# EAGLE board SparkFun_Thing_Plus_RA6M5-Panel (EAGLE 9.6.2), part 1 of 3
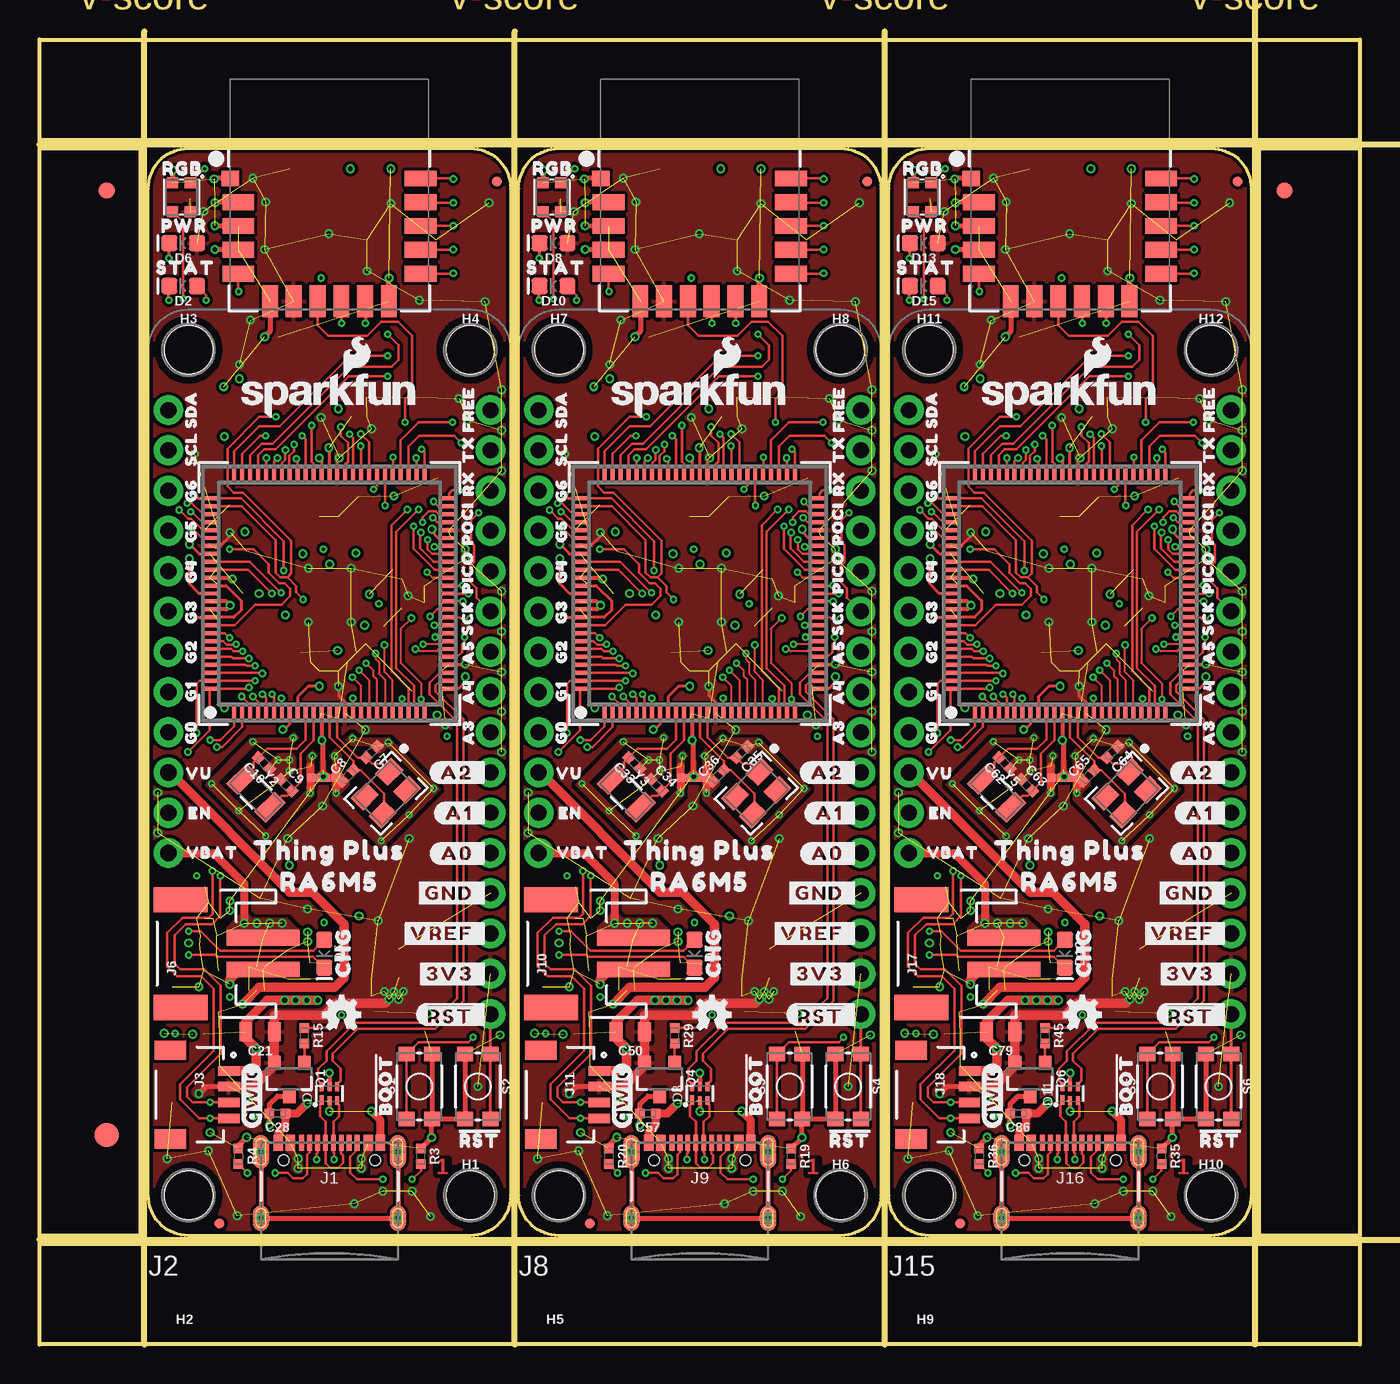
[diagram p0: board, top side]
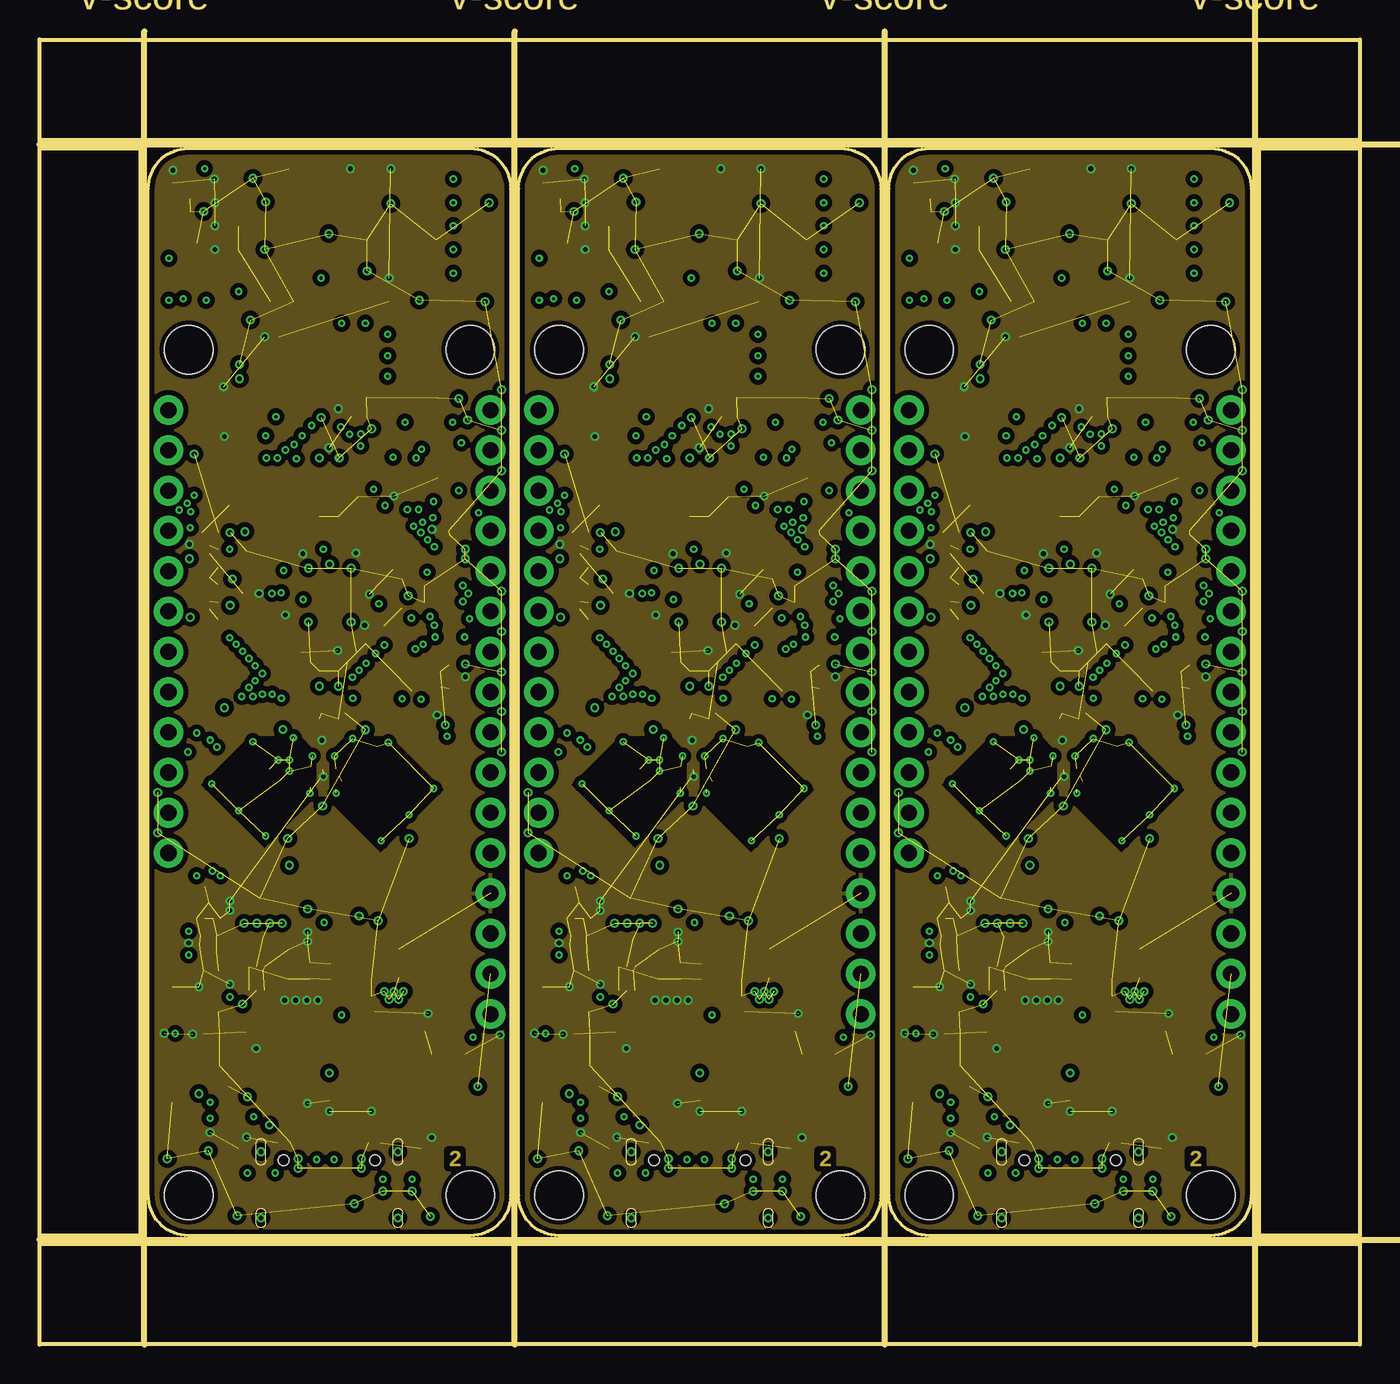
[diagram p1: board, inner layer Route2]
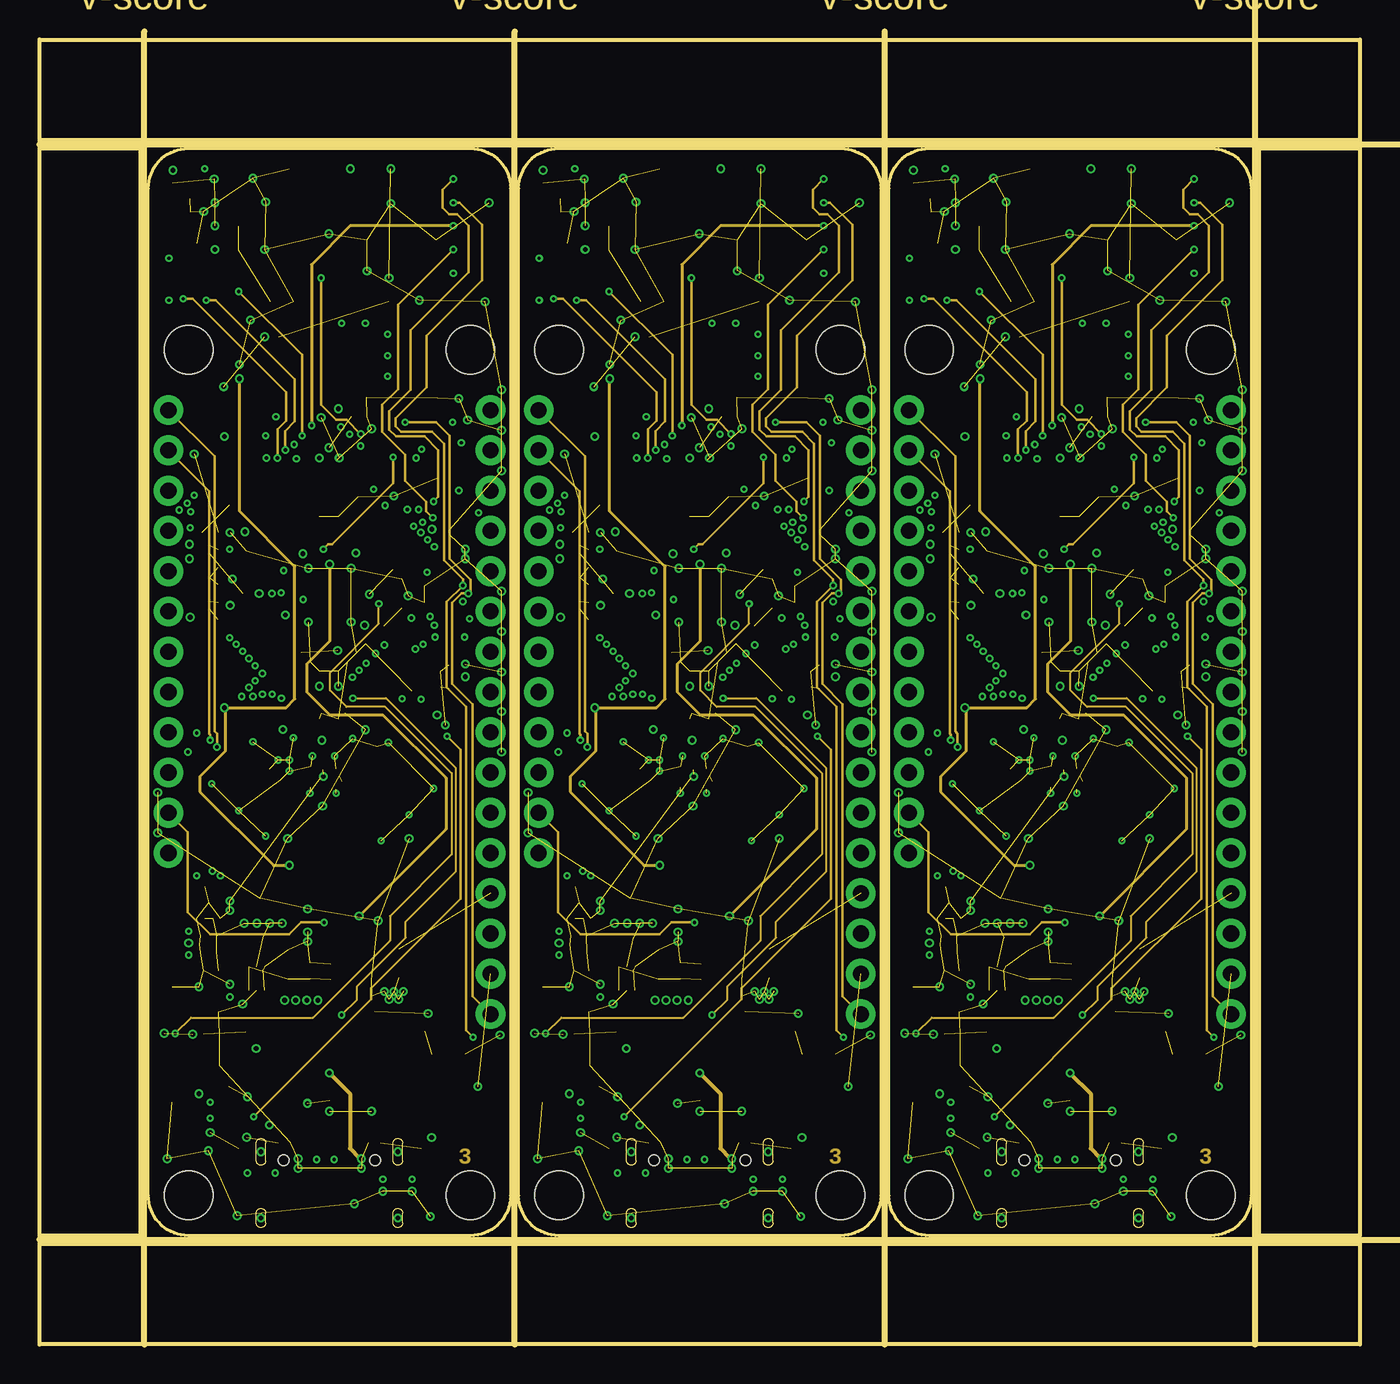
[diagram p2: board, inner layer Route3]
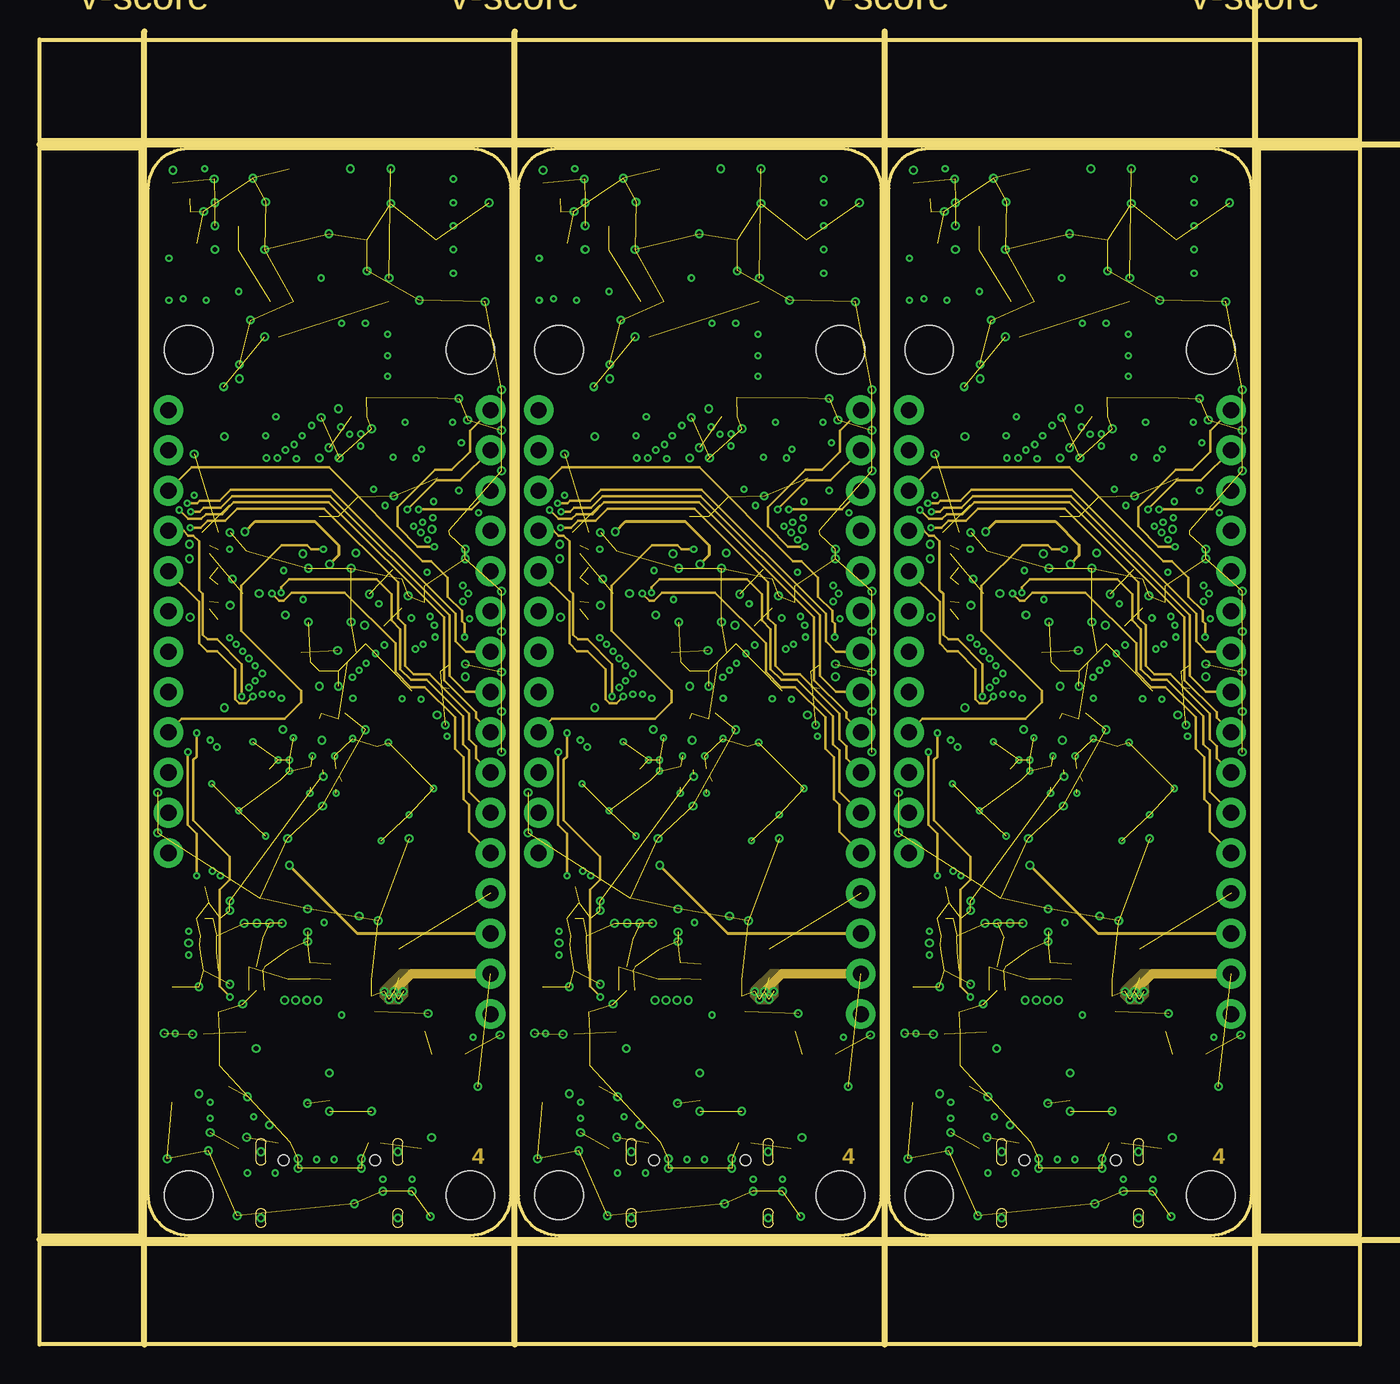
[diagram p3: board, inner layer Route14]
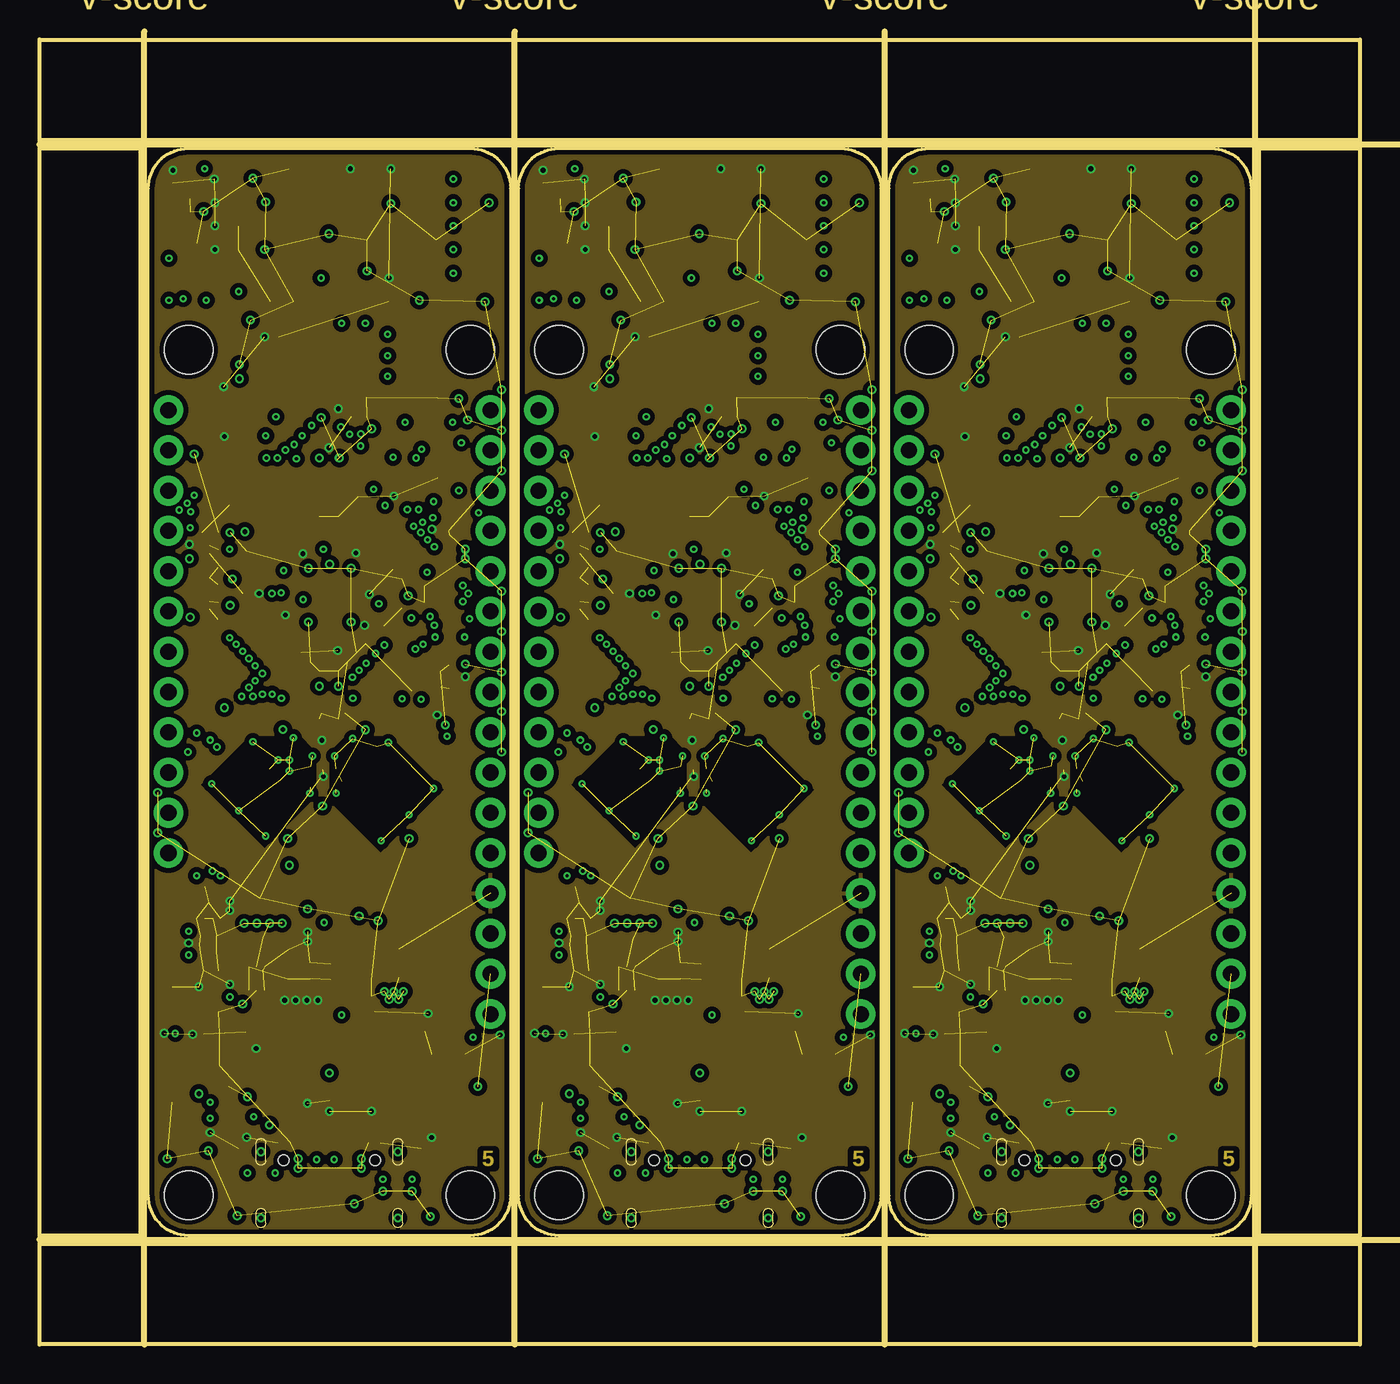
[diagram p4: board, inner layer Route15]
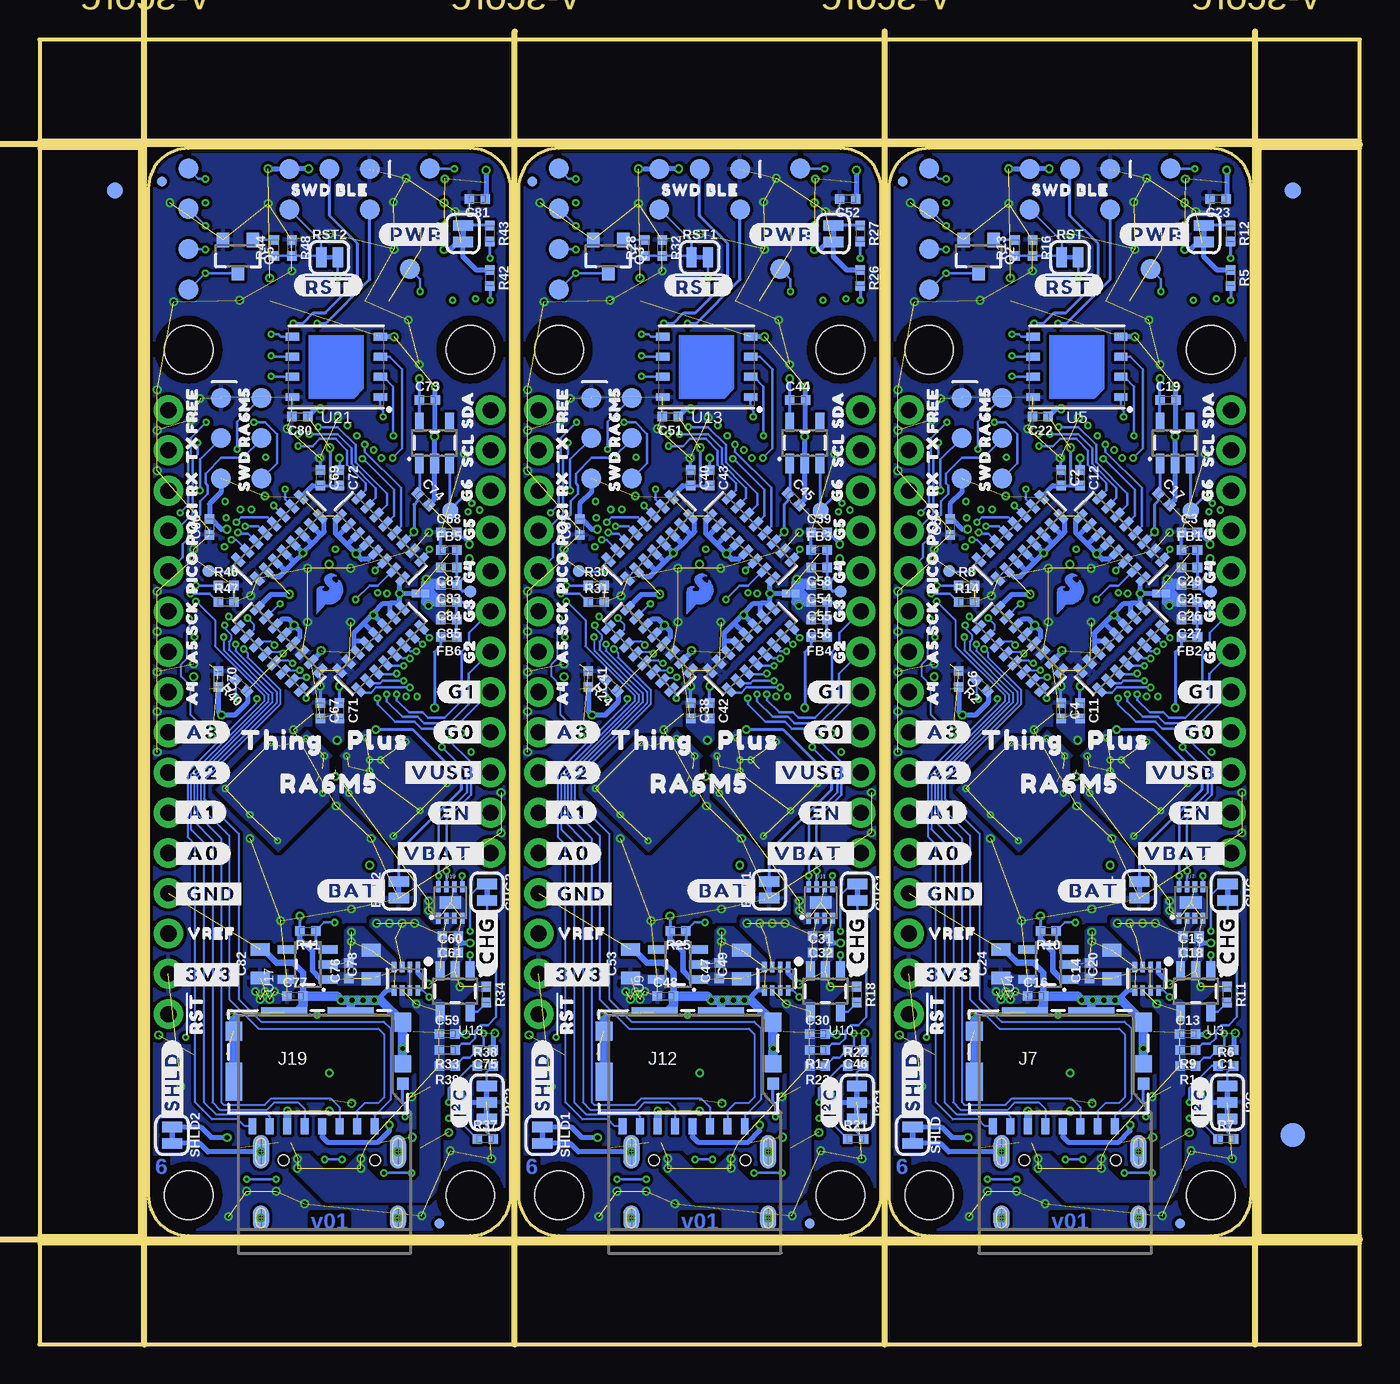
[diagram p5: board, bottom side, seen from below]

Size 83.31 x 82.3 mm. Coordinates in mm from the lower left corner, seen from the top.
Outline: 6.86,72.9 arc-90 9.4,75.44 27.18,75.44 arc-90 29.72,72.9 29.72,9.4 arc-90 27.18,6.86 9.4,6.86 arc-90 6.86,9.4 6.86,72.9
Outline: 30.23,72.9 arc-90 32.77,75.44 50.55,75.44 arc-90 53.09,72.9 53.09,9.4 arc-90 50.55,6.86 32.77,6.86 arc-90 30.23,9.4 30.23,72.9
Outline: 53.59,72.9 arc-90 56.13,75.44 73.91,75.44 arc-90 76.45,72.9 76.45,9.4 arc-90 73.91,6.86 56.13,6.86 arc-90 53.59,9.4 53.59,72.9
Outline: 0,6.35 83.31,6.35 83.31,0 0,0 0,6.35
Outline: 76.96,75.44 83.31,75.44 83.31,6.86 76.96,6.86 76.96,75.44
Outline: 0,82.3 83.31,82.3 83.31,75.95 0,75.95 0,82.3
Outline: 0,75.44 6.35,75.44 6.35,6.86 0,6.86 0,75.44
Copper layers (1+2*3+14*15+16): Top 0.035mm / dielectric 0.0994mm / Route2 0.0152mm / dielectric 0.55mm / Route3 0.0152mm / dielectric 0.1088mm / Route14 0.0152mm / dielectric 0.55mm / Route15 0.0152mm / dielectric 0.0994mm / Bottom 0.035mm
Design rules "SparkFun_Thing_Plus_RA6M5": minimum track width 0.09mm, minimum drill 0.2mm, track to track 0.09mm, track to pad 5mil, pad to pad 5mil, via to via 5mil, smd to smd 5mil, copper to edge 7mil, drill to drill 7mil, minimum pad ring 5mil, minimum via ring 5mil, stop-mask expansion 2.5mil, vias tented up to drill 25mil, thermal gap 10mil
Net classes: 2 CLK signals: width 0.15 mm, drill 0.2 mm, clearance 0.15 mm to class 0, clearance 0.15 mm to class 1, clearance 0.15 mm; 3 Analog Ground: width 0.2 mm, clearance 0.2 mm to class 1, clearance 0.3 mm to class 2; 4 Power: width 0.2 mm, drill 0.3 mm, clearance 0.2 mm to class 0, clearance 0.1 mm to class 1, clearance 0.15 mm to class 2, clearance 0.2 mm to class 3, clearance 0.2 mm; 5 USB diff: width 0.16 mm, drill 0.2 mm, clearance 0.3 mm to class 0, clearance 0.3 mm to class 1, clearance 0.3 mm to class 2, clearance 0.3 mm to class 3, clearance 0.2 mm to class 4, clearance 0.22 mm
Milling: 6 lines

## Footprints (pad centres in the part's own frame; a part is rotated, then mirrored left to right if it is on the bottom)
SMT-JUMPER_2_NC_TRACE_SILK = smd 0.66 x 1.27: 1 -0.521,0; 2 0.521,0
0402-TIGHT = smd 0.6 x 0.6: 1 -0.5,0; 2 0.5,0
0402-TIGHT_NO_CREAM = smd 0.6 x 0.6: 1 -0.5,0; 2 0.5,0
0805 = smd 0.8 x 1.2: 1 -0.9,0; 2 0.9,0
SOT886 = smd 0.61 x 0.25: 1 -0.405,0.5 | smd 0.56 x 0.25: 2 -0.43,0; 3 -0.43,-0.5; 4 0.43,-0.5; 5 0.43,0; 6 0.43,0.5
LED-0603 = smd 1 x 1: A -0.877,0; C 0.877,0
WS2812-2020 = smd 0.7 x 0.7: DI -0.915,0.55; DO 0.915,-0.55; GND 0.915,0.55; VCC -0.915,-0.55
FIDUCIAL-1X2 = smd 1 x 1: 1 0,0
FIDUCIAL-1.5X3 = smd 1.5 x 1.5: 1 0,0
FIDUCIAL-MICRO = smd 0.635 x 0.635: 1 0,0
STAND-OFF-TIGHT = hole 3.048: 0,0
SMT-JUMPER_3_2-NC_TRACE_SILK = smd 0.66 x 1.27: 1 -1.041,0; 2 0,0; 3 1.041,0
USB-C-16P-6LAYER-ISOLATED = smd 0.3 x 1: A5 -1.25,-0.34; A6 -0.25,-0.34; A7 0.25,-0.34; A8 1.25,-0.34; B5 1.75,-0.34; B6 0.75,-0.34; B7 -0.75,-0.34; B8 -1.75,-0.34 | smd 0.6 x 1: GND -3.225,-0.34; GND2 3.225,-0.34; VBUS1 -2.45,-0.34; VBUS2 2.45,-0.34 | smd 1 x 2.1: SHLD1 -4.32,-0.915; SHLD2 4.32,-0.915 | smd 1 x 2.1 bottom: SHLD3 -4.32,-0.915; SHLD4 4.32,-0.915 | smd 1 x 1.6: SHLD5 -4.32,-5.095; SHLD8 4.32,-5.095 | smd 1 x 1.6 bottom: SHLD6 -4.32,-5.095; SHLD7 4.32,-5.095 | hole 0.65: -2.89,-1.445; 2.89,-1.445
THING_PLUS = drill 1.016 pad 1.88: 1 1.27,52.07; 2 1.27,49.53; 3 1.27,46.99; 4 1.27,44.45; 5 1.27,41.91; 6 1.27,39.37; 7 1.27,36.83; 8 1.27,34.29; 9 1.27,31.75; 10 1.27,29.21; 11 1.27,26.67; 12 1.27,24.13; 13 21.59,52.07; 14 21.59,49.53; 15 21.59,46.99; 16 21.59,44.45; 17 21.59,41.91; 18 21.59,39.37; 19 21.59,36.83; 20 21.59,34.29; 21 21.59,31.75; 22 21.59,29.21; 23 21.59,26.67; 24 21.59,24.13; 25 21.59,21.59; 26 21.59,19.05; 27 21.59,16.51; 28 21.59,13.97
JST04_1MM_RA = smd 0.6 x 1.35: 1 -1.5,0; 2 -0.5,0; 3 0.5,0; 4 1.5,0 | smd 1.2 x 2: NC1 2.8,-3.675; NC2 -2.8,-3.675
PAD_05_03X2_TP = smd 1.27 x 1.27: 1 -2.54,-1.27; 2 -2.54,1.27; 3 0,-1.27; 4 0,1.27; 5 2.54,-1.27; 6 2.54,1.27
PAD_05_03X2_TP_NO4 = smd 1.27 x 1.27: 1 -2.54,-1.27; 2 -2.54,1.27; 3 0,-1.27; 5 2.54,-1.27; 6 2.54,1.27
JST-2-SMD = smd 1 x 4.6: 1 -1,-3.7; 2 1,-3.7 | smd 1.6 x 3.4: NC1 -3.4,1.5; NC2 3.4,1.5
MICROSD_TINY = smd 0.5 x 1: 1 3.55,-3.85; 2 2.45,-3.85; 3 1.35,-3.85; 4 0.25,-3.85; 5 -0.85,-3.85; 6 -1.95,-3.85; 7 -3.05,-3.85; 8 -4.15,-3.85 | smd 0.72 x 0.78: 9 5.35,-1.17 | smd 1.05 x 1.08: GND1 5.35,0.1 | smd 1.05 x 1.2: GND2 5.35,2.71; GND3 -5.325,2.14 | smd 1.05 x 2.39: GND4 -5.325,-1.045 | smd 2.91 x 0.55: GND5 -2.145,3.385; GND6 2.045,3.385
SOT23-3 = smd 0.8 x 0.9: 1 -0.95,-1; 2 0.95,-1; 3 0,1.1
2506_AR = smd 0.45 x 0.9: 1 -2.8,-0.85; 2 -2,-0.85; 3 -1.2,-0.85; 4 -0.4,-0.85; 5 0.4,-0.85; 6 1.2,-0.85; 7 2,-0.85; 8 2.8,-0.85; 9 2.8,0.85; 10 2,0.85; 11 1.2,0.85; 12 0.4,0.85; 13 -0.4,0.85; 14 -1.2,0.85; 15 -2,0.85; 16 -2.8,0.85
TACTILE_SWITCH_SMD_4.6X2.8MM = smd 0.9 x 1: 1 -2.05,-0.8; 2 2.05,-0.8; 3 2.05,0.8; 4 -2.05,0.8
2PT_GND_TIE_SMALL = smd 0.5 x 0.5: P$1 0,0.3; P$2 0,-0.3
PAD.03X.05 = smd 1.27 x 1.27: 1 0,0
PAD.03X.04 = smd 1.016 x 1.016: 1 0,0
PAD.03X.03 = smd 0.762 x 0.762: 1 0,0
P-LQFP100-14X14-0.50 = smd 0.25 x 1.1: 1 -6,-7.55; 2 -5.5,-7.55; 3 -5,-7.55; 4 -4.5,-7.55; 5 -4,-7.55; 6 -3.5,-7.55; 7 -3,-7.55; 8 -2.5,-7.55; 9 -2,-7.55; 10 -1.5,-7.55; 11 -1,-7.55; 12 -0.5,-7.55; 13 0,-7.55; 14 0.5,-7.55; 15 1,-7.55; 16 1.5,-7.55; 17 2,-7.55; 18 2.5,-7.55; 19 3,-7.55; 20 3.5,-7.55; 21 4,-7.55; 22 4.5,-7.55; 23 5,-7.55; 24 5.5,-7.55; 25 6,-7.55; 51 6,7.55; 52 5.5,7.55; 53 5,7.55; 54 4.5,7.55; 55 4,7.55; 56 3.5,7.55; 57 3,7.55; 58 2.5,7.55; 59 2,7.55; 60 1.5,7.55; 61 1,7.55; 62 0.5,7.55; 63 0,7.55; 64 -0.5,7.55; 65 -1,7.55; 66 -1.5,7.55; 67 -2,7.55; 68 -2.5,7.55; 69 -3,7.55; 70 -3.5,7.55; 71 -4,7.55; 72 -4.5,7.55; 73 -5,7.55; 74 -5.5,7.55; 75 -6,7.55 | smd 1.1 x 0.25: 26 7.55,-6; 27 7.55,-5.5; 28 7.55,-5; 29 7.55,-4.5; 30 7.55,-4; 31 7.55,-3.5; 32 7.55,-3; 33 7.55,-2.5; 34 7.55,-2; 35 7.55,-1.5; 36 7.55,-1; 37 7.55,-0.5; 38 7.55,0; 39 7.55,0.5; 40 7.55,1; 41 7.55,1.5; 42 7.55,2; 43 7.55,2.5; 44 7.55,3; 45 7.55,3.5; 46 7.55,4; 47 7.55,4.5; 48 7.55,5; 49 7.55,5.5; 50 7.55,6; 76 -7.55,6; 77 -7.55,5.5; 78 -7.55,5; 79 -7.55,4.5; 80 -7.55,4; 81 -7.55,3.5; 82 -7.55,3; 83 -7.55,2.5; 84 -7.55,2; 85 -7.55,1.5; 86 -7.55,1; 87 -7.55,0.5; 88 -7.55,0; 89 -7.55,-0.5; 90 -7.55,-1; 91 -7.55,-1.5; 92 -7.55,-2; 93 -7.55,-2.5; 94 -7.55,-3; 95 -7.55,-3.5; 96 -7.55,-4; 97 -7.55,-4.5; 98 -7.55,-5; 99 -7.55,-5.5; 100 -7.55,-6
DA14531MOD = smd 1.1 x 1: 1 -6.25,1 | smd 2 x 1: 2 -5.75,-0.5; 3 -5.75,-2; 4 -5.75,-3.5; 5 -5.75,-5; 12 5.75,-5; 13 5.75,-3.5; 14 5.75,-2; 15 5.75,-0.5; 16 5.75,1 | smd 1 x 2: 6 -3.75,-6.75; 7 -2.25,-6.75; 8 -0.75,-6.75; 9 0.75,-6.75; 10 2.25,-6.75; 11 3.75,-6.75
SOT23-5 = smd 0.55 x 1.2: 1 -0.95,-1.3; 2 0,-1.3; 3 0.95,-1.3; 4 0.95,1.3; 5 -0.95,1.3
WSON-8-6X5 = smd 0.85 x 0.5: 1 -2.775,1.905; 2 -2.775,0.635; 3 -2.775,-0.635; 4 -2.775,-1.905; 5 2.775,-1.905; 6 2.775,-0.635; 7 2.775,0.635; 8 2.775,1.905
DFN-8 = smd 0.3 x 0.7: 1 -0.75,-0.99; 2 -0.25,-0.99; 3 0.25,-0.99; 4 0.75,-0.99; 5 0.75,0.99; 6 0.25,0.99; 7 -0.25,0.99; 8 -0.75,0.99 | smd 1.38 x 0.8: 9 0,0
SOT8 = smd 0.67 x 0.3: 1 -0.74,0.75; 2 -0.74,0.25; 3 -0.74,-0.25; 4 -0.74,-0.75; 5 0.74,-0.75; 6 0.74,-0.25; 7 0.74,0.25; 8 0.74,0.75
4-SMD,32X25 = smd 1.4 x 1.1: 1 -1.1,-0.8; 2 1.1,-0.8; 3 1.1,0.8; 4 -1.1,0.8
CRYSTAL-SMD-3.2X1.5MM = smd 1 x 1.8: P$1 -1.25,0; P$2 1.25,0

## Placement (x,y rotation side)
BAT  JUMPER-SMT_2_NC_TRACE_SILK  [SMT-JUMPER_2_NC_TRACE_SILK]  13.91,28.66 90 bottom
BAT1  JUMPER-SMT_2_NC_TRACE_SILK  [SMT-JUMPER_2_NC_TRACE_SILK]  37.28,28.66 90 bottom
BAT2  JUMPER-SMT_2_NC_TRACE_SILK  [SMT-JUMPER_2_NC_TRACE_SILK]  60.64,28.66 90 bottom
C1  1.0uF  [0402-TIGHT]  8.46,18.56 180 bottom
C2  0.1uF  [0402-TIGHT]  18.86,54.66 270 bottom
C3  0.1uF  [0402-TIGHT]  10.76,51.21 0 bottom
C4  0.1uF  [0402-TIGHT]  18.86,39.96 270 bottom
C5  0.1uF  [0402-TIGHT]  25.86,51.56 90 bottom
C6  0.1uF  [0402-TIGHT]  25.31,41.96 270 bottom
C7  DNP  [0402-TIGHT_NO_CREAM]  20.96,37.36 225 top
C8  DNP  [0402-TIGHT_NO_CREAM]  19.46,35.86 45 top
C9  9.1pF  [0402-TIGHT]  15.56,35.26 315 top
C10  9.1pF  [0402-TIGHT]  14.16,36.66 135 top
C11  0.1uF  [0402-TIGHT]  17.66,39.96 270 bottom
C12  0.1uF  [0402-TIGHT]  17.66,54.66 270 bottom
C13  2.2uF  [0402-TIGHT]  10.86,19.57 0 bottom
C14  2.2uF  [0402-TIGHT]  17.06,23.56 90 bottom
C15  2.2uF  [0402-TIGHT]  10.67,24.72 0 bottom
C16  2.2uF  [0402-TIGHT]  20.46,21.96 0 bottom
C17  2.2uF  [0402-TIGHT]  12.36,53.31 315 bottom
C18  0.1uF  [0402-TIGHT]  10.66,25.76 180 bottom
C19  1.0uF  [0402-TIGHT]  12.11,59.56 0 bottom
C20  10uF  [0805]  15.66,23.96 90 bottom
C21  10uF  [0805]  13.91,19.71 180 top
C22  0.1uF  [0402-TIGHT]  20.16,58.51 180 bottom
C23  0.1uF  [0402-TIGHT]  8.96,72.26 180 bottom
C24  47uF/6.3V  [0805]  22.66,24.01 90 bottom
C25  0.1uF  [0402-TIGHT]  10.76,47.91 180 bottom
C26  0.1uF  [0402-TIGHT]  10.76,46.81 180 bottom
C27  1.0uF  [0402-TIGHT]  10.76,45.71 180 bottom
C28  0.1uF  [0402-TIGHT]  15.01,14.56 180 top
C29  1.0uF  [0402-TIGHT]  10.76,49.01 180 bottom
C30  2.2uF  [0402-TIGHT]  34.23,19.57 0 bottom
C31  2.2uF  [0402-TIGHT]  34.03,24.72 0 bottom
C32  0.1uF  [0402-TIGHT]  34.03,25.76 180 bottom
C33  9.1pF  [0402-TIGHT]  37.53,36.66 135 top
C34  9.1pF  [0402-TIGHT]  38.93,35.26 315 top
C35  DNP  [0402-TIGHT_NO_CREAM]  44.33,37.36 225 top
C36  DNP  [0402-TIGHT_NO_CREAM]  42.83,35.86 45 top
C37  0.1uF  [0402-TIGHT]  49.23,51.56 90 bottom
C38  0.1uF  [0402-TIGHT]  42.23,39.96 270 bottom
C39  0.1uF  [0402-TIGHT]  34.13,51.21 0 bottom
C40  0.1uF  [0402-TIGHT]  42.23,54.66 270 bottom
C41  0.1uF  [0402-TIGHT]  48.68,41.96 270 bottom
C42  0.1uF  [0402-TIGHT]  41.03,39.96 270 bottom
C43  0.1uF  [0402-TIGHT]  41.03,54.66 270 bottom
C44  1.0uF  [0402-TIGHT]  35.48,59.56 0 bottom
C45  2.2uF  [0402-TIGHT]  35.73,53.31 315 bottom
C46  1.0uF  [0402-TIGHT]  31.83,18.56 180 bottom
C47  2.2uF  [0402-TIGHT]  40.43,23.56 90 bottom
C48  2.2uF  [0402-TIGHT]  43.83,21.96 0 bottom
C49  10uF  [0805]  39.03,23.96 90 bottom
C50  10uF  [0805]  37.28,19.71 180 top
C51  0.1uF  [0402-TIGHT]  43.53,58.51 180 bottom
C52  0.1uF  [0402-TIGHT]  32.33,72.26 180 bottom
C53  47uF/6.3V  [0805]  46.03,24.01 90 bottom
C54  0.1uF  [0402-TIGHT]  34.13,47.91 180 bottom
C55  0.1uF  [0402-TIGHT]  34.13,46.81 180 bottom
C56  1.0uF  [0402-TIGHT]  34.13,45.71 180 bottom
C57  0.1uF  [0402-TIGHT]  38.38,14.56 180 top
C58  1.0uF  [0402-TIGHT]  34.13,49.01 180 bottom
C59  2.2uF  [0402-TIGHT]  57.6,19.57 0 bottom
C60  2.2uF  [0402-TIGHT]  57.4,24.72 0 bottom
C61  0.1uF  [0402-TIGHT]  57.39,25.76 180 bottom
C62  9.1pF  [0402-TIGHT]  60.89,36.66 135 top
C63  9.1pF  [0402-TIGHT]  62.29,35.26 315 top
C64  DNP  [0402-TIGHT_NO_CREAM]  67.69,37.36 225 top
C65  DNP  [0402-TIGHT_NO_CREAM]  66.19,35.86 45 top
C66  0.1uF  [0402-TIGHT]  72.59,51.56 90 bottom
C67  0.1uF  [0402-TIGHT]  65.59,39.96 270 bottom
C68  0.1uF  [0402-TIGHT]  57.49,51.21 0 bottom
C69  0.1uF  [0402-TIGHT]  65.59,54.66 270 bottom
C70  0.1uF  [0402-TIGHT]  72.04,41.96 270 bottom
C71  0.1uF  [0402-TIGHT]  64.39,39.96 270 bottom
C72  0.1uF  [0402-TIGHT]  64.39,54.66 270 bottom
C73  1.0uF  [0402-TIGHT]  58.84,59.56 0 bottom
C74  2.2uF  [0402-TIGHT]  59.09,53.31 315 bottom
C75  1.0uF  [0402-TIGHT]  55.19,18.56 180 bottom
C76  2.2uF  [0402-TIGHT]  63.79,23.56 90 bottom
C77  2.2uF  [0402-TIGHT]  67.19,21.96 0 bottom
C78  10uF  [0805]  62.39,23.96 90 bottom
C79  10uF  [0805]  60.64,19.71 180 top
C80  0.1uF  [0402-TIGHT]  66.89,58.51 180 bottom
C81  0.1uF  [0402-TIGHT]  55.69,72.26 180 bottom
C82  47uF/6.3V  [0805]  69.39,24.01 90 bottom
C83  0.1uF  [0402-TIGHT]  57.49,47.91 180 bottom
C84  0.1uF  [0402-TIGHT]  57.49,46.81 180 bottom
C85  1.0uF  [0402-TIGHT]  57.49,45.71 180 bottom
C86  0.1uF  [0402-TIGHT]  61.74,14.56 180 top
C87  1.0uF  [0402-TIGHT]  57.49,49.01 180 bottom
CHG  JUMPER-SMT_2_NC_TRACE_SILK  [SMT-JUMPER_2_NC_TRACE_SILK]  8.35,28.51 270 bottom
CHG1  JUMPER-SMT_2_NC_TRACE_SILK  [SMT-JUMPER_2_NC_TRACE_SILK]  31.71,28.51 270 bottom
CHG2  JUMPER-SMT_2_NC_TRACE_SILK  [SMT-JUMPER_2_NC_TRACE_SILK]  55.08,28.51 270 bottom
D1  PRTR5V0U2F  [SOT886]  18.29,15.81 90 top
D2  BLUE  [LED-0603]  9.06,66.76 180 top
D3  PRTR5V0U2F  [SOT886]  41.66,15.81 90 top
D4  WS2812_2020  [WS2812-2020]  8.96,72.36 90 top
D5  Yellow  [LED-0603]  17.96,24.64 270 top
D6  [LED-0603]  9.06,69.46 180 top
D7  Yellow  [LED-0603]  41.33,24.64 270 top
D8  [LED-0603]  32.43,69.46 180 top
D9  WS2812_2020  [WS2812-2020]  32.33,72.36 90 top
D10  BLUE  [LED-0603]  32.43,66.76 180 top
D11  PRTR5V0U2F  [SOT886]  65.02,15.81 90 top
D12  Yellow  [LED-0603]  64.69,24.64 270 top
D13  [LED-0603]  55.79,69.46 180 top
D14  WS2812_2020  [WS2812-2020]  55.69,72.36 90 top
D15  BLUE  [LED-0603]  55.79,66.76 180 top
E$1  [FIDUCIAL-1X2]  4.23,72.77 0 top
E$2  [FIDUCIAL-1X2]  4.23,72.77 0 bottom
E$3  [FIDUCIAL-1X2]  78.57,72.77 0 top
E$4  [FIDUCIAL-1X2]  78.57,72.77 0 bottom
E$5  [FIDUCIAL-1.5X3]  4.23,13.21 0 top
E$6  [FIDUCIAL-1.5X3]  4.23,13.21 0 bottom
FB1  120-OHM  [0402-TIGHT]  10.76,50.11 0 bottom
FB2  120-OHM  [0402-TIGHT]  10.76,44.61 180 bottom
FB3  120-OHM  [0402-TIGHT]  34.13,50.11 0 bottom
FB4  120-OHM  [0402-TIGHT]  34.13,44.61 180 bottom
FB5  120-OHM  [0402-TIGHT]  57.49,50.11 0 bottom
FB6  120-OHM  [0402-TIGHT]  57.49,44.61 180 bottom
FD1  FIDUCIALUFIDUCIAL  [FIDUCIAL-MICRO]  28.86,73.36 0 top
FD2  FIDUCIALUFIDUCIAL  [FIDUCIAL-MICRO]  11.36,7.61 0 bottom
FD3  FIDUCIALUFIDUCIAL  [FIDUCIAL-MICRO]  28.86,73.36 0 bottom
FD4  FIDUCIALUFIDUCIAL  [FIDUCIAL-MICRO]  11.36,7.61 0 top
FD5  FIDUCIALUFIDUCIAL  [FIDUCIAL-MICRO]  34.73,7.61 0 top
FD6  FIDUCIALUFIDUCIAL  [FIDUCIAL-MICRO]  34.73,7.61 0 bottom
FD7  FIDUCIALUFIDUCIAL  [FIDUCIAL-MICRO]  52.23,73.36 0 top
FD8  FIDUCIALUFIDUCIAL  [FIDUCIAL-MICRO]  52.23,73.36 0 bottom
FD9  FIDUCIALUFIDUCIAL  [FIDUCIAL-MICRO]  58.09,7.61 0 top
FD10  FIDUCIALUFIDUCIAL  [FIDUCIAL-MICRO]  58.09,7.61 0 bottom
FD11  FIDUCIALUFIDUCIAL  [FIDUCIAL-MICRO]  75.59,73.36 0 top
FD12  FIDUCIALUFIDUCIAL  [FIDUCIAL-MICRO]  75.59,73.36 0 bottom
FRAME1  FRAME-LEDGERNO_FOOTPRINT  [DUMMY]  54.5,8.75 0 top
FRAME2  FRAME-LEDGERNO_FOOTPRINT  [DUMMY]  31.13,8.75 0 top
FRAME3  FRAME-LEDGERNO_FOOTPRINT  [DUMMY]  77.87,8.75 0 top
H1  STAND-OFFTIGHT  [STAND-OFF-TIGHT]  27.18,9.4 0 top
H2  STAND-OFFTIGHT  [STAND-OFF-TIGHT]  9.4,9.4 0 top
H3  STAND-OFFTIGHT  [STAND-OFF-TIGHT]  9.4,62.74 0 top
H4  STAND-OFFTIGHT  [STAND-OFF-TIGHT]  27.18,62.74 0 top
H5  STAND-OFFTIGHT  [STAND-OFF-TIGHT]  32.77,9.4 0 top
H6  STAND-OFFTIGHT  [STAND-OFF-TIGHT]  50.55,9.4 0 top
H7  STAND-OFFTIGHT  [STAND-OFF-TIGHT]  32.77,62.74 0 top
H8  STAND-OFFTIGHT  [STAND-OFF-TIGHT]  50.55,62.74 0 top
H9  STAND-OFFTIGHT  [STAND-OFF-TIGHT]  56.13,9.4 0 top
H10  STAND-OFFTIGHT  [STAND-OFF-TIGHT]  73.91,9.4 0 top
H11  STAND-OFFTIGHT  [STAND-OFF-TIGHT]  56.13,62.74 0 top
H12  STAND-OFFTIGHT  [STAND-OFF-TIGHT]  73.91,62.74 0 top
I2C  JUMPER-SMT_3_2-NC_TRACE_SILK  [SMT-JUMPER_3_2-NC_TRACE_SILK]  8.36,15.26 270 bottom
I2C1  JUMPER-SMT_3_2-NC_TRACE_SILK  [SMT-JUMPER_3_2-NC_TRACE_SILK]  31.73,15.26 270 bottom
I2C2  JUMPER-SMT_3_2-NC_TRACE_SILK  [SMT-JUMPER_3_2-NC_TRACE_SILK]  55.09,15.26 270 bottom
J1  USB Female Type C Connector  [USB-C-16P-6LAYER-ISOLATED]  18.29,13.06 0 top
J2  THING_PLUS_LOGICAL  [THING_PLUS]  6.86,6.86 0 top
J3  QWIIC_RA  [JST04_1MM_RA]  11.94,15.75 270 top
J4  CONN_03X2  [PAD_05_03X2_TP]  23.86,57.16 270 bottom
J5  [PAD_05_03X2_TP_NO4]  18.29,72.86 180 bottom
J6  [JST-2-SMD]  10.41,24.64 90 top
J7  MICRO-SDFRICTION  [MICROSD_TINY]  19,17.6 0 bottom
J8  THING_PLUS_LOGICAL  [THING_PLUS]  30.23,6.86 0 top
J9  USB Female Type C Connector  [USB-C-16P-6LAYER-ISOLATED]  41.66,13.06 0 top
J10  [JST-2-SMD]  33.78,24.64 90 top
J11  QWIIC_RA  [JST04_1MM_RA]  35.31,15.75 270 top
J12  MICRO-SDFRICTION  [MICROSD_TINY]  42.37,17.6 0 bottom
J13  CONN_03X2  [PAD_05_03X2_TP]  47.23,57.16 270 bottom
J14  [PAD_05_03X2_TP_NO4]  41.66,72.86 180 bottom
J15  THING_PLUS_LOGICAL  [THING_PLUS]  53.59,6.86 0 top
J16  USB Female Type C Connector  [USB-C-16P-6LAYER-ISOLATED]  65.02,13.06 0 top
J17  [JST-2-SMD]  57.15,24.64 90 top
J18  QWIIC_RA  [JST04_1MM_RA]  58.67,15.75 270 top
J19  MICRO-SDFRICTION  [MICROSD_TINY]  65.74,17.6 0 bottom
J20  CONN_03X2  [PAD_05_03X2_TP]  70.59,57.16 270 bottom
J21  [PAD_05_03X2_TP_NO4]  65.02,72.86 180 bottom
JP1  JUMPER-SMT_2_NC_TRACE_SILK  [SMT-JUMPER_2_NC_TRACE_SILK]  33.23,70.06 90 bottom
JP2  JUMPER-SMT_2_NC_TRACE_SILK  [SMT-JUMPER_2_NC_TRACE_SILK]  56.59,70.06 90 bottom
JP4  JUMPER-SMT_2_NC_TRACE_SILK  [SMT-JUMPER_2_NC_TRACE_SILK]  9.86,70.06 90 bottom
LOGO1  OSHW-LOGOMINI  [OSHW-LOGO-MINI]  19.06,20.79 0 top
LOGO2  SFE_LOGO_NAME_FLAME.1_INCH  [SFE_LOGO_NAME_FLAME_.1]  18.29,59.86 0 top
LOGO3  QWIIC_LOGO_4MM  [QWIIC_4MM]  13.4,15.68 90 top
LOGO4  SFE_LOGO_NAME_FLAMEBLANK  [BLANK]  30.12,7.74 0 top
LOGO5  SFE_LOGO_NAME_FLAME.1_INCH  [SFE_LOGO_NAME_FLAME_.1]  41.66,59.86 0 top
LOGO6  QWIIC_LOGO_4MM  [QWIIC_4MM]  36.77,15.68 90 top
LOGO7  OSHW-LOGOMINI  [OSHW-LOGO-MINI]  42.43,20.79 0 top
LOGO8  SFE_LOGO_NAME_FLAMEBLANK  [BLANK]  53.49,7.74 0 top
LOGO9  SFE_LOGO_NAME_FLAME.1_INCH  [SFE_LOGO_NAME_FLAME_.1]  65.02,59.86 0 top
LOGO10  QWIIC_LOGO_4MM  [QWIIC_4MM]  60.13,15.68 90 top
LOGO11  OSHW-LOGOMINI  [OSHW-LOGO-MINI]  65.79,20.79 0 top
LOGO12  SFE_LOGO_NAME_FLAMEBLANK  [BLANK]  76.85,7.74 0 top
Q1  20V/4.2A/52mΩ/1.4W  [SOT23-3]  15.76,16.76 180 top
Q2  20V/4.2A/52mΩ/1.4W  [SOT23-3]  24.06,68.66 180 bottom
Q3  20V/4.2A/52mΩ/1.4W  [SOT23-3]  47.43,68.66 180 bottom
Q4  20V/4.2A/52mΩ/1.4W  [SOT23-3]  39.13,16.76 180 top
Q5  20V/4.2A/52mΩ/1.4W  [SOT23-3]  70.79,68.66 180 bottom
Q6  20V/4.2A/52mΩ/1.4W  [SOT23-3]  62.49,16.76 180 top
R1  1k  [0402-TIGHT]  10.86,17.56 180 bottom
R2  20k  [0402-TIGHT]  23.86,41.56 135 bottom
R3  5.1k  [0402-TIGHT]  24.06,11.86 270 top
R4  5.1k  [0402-TIGHT]  12.56,11.86 270 top
R5  2.2k  [0402-TIGHT]  8.16,67.26 270 bottom
R6  2.2k  [0402-TIGHT]  8.46,17.56 0 bottom
R7  2.2k  [0402-TIGHT]  8.46,12.96 0 bottom
R8  10k  [0402-TIGHT]  24.81,47.86 0 bottom
R9  4.7k  [0402-TIGHT]  10.86,18.56 180 bottom
R10  1M  [0402-TIGHT]  19.66,26.06 180 bottom
R11  4.7k  [0402-TIGHT]  8.38,22.05 270 bottom
R12  4.7k  [0402-TIGHT]  8.16,70.06 270 bottom
R13  1k  [0402-TIGHT]  21.76,69.16 90 bottom
R14  10k  [0402-TIGHT]  24.81,46.81 0 bottom
R15  1k  [0402-TIGHT]  16.71,19.46 270 top
R16  10k  [0402-TIGHT]  20.66,69.16 270 bottom
R17  4.7k  [0402-TIGHT]  34.23,18.56 180 bottom
R18  4.7k  [0402-TIGHT]  31.74,22.05 270 bottom
R19  5.1k  [0402-TIGHT]  47.43,11.86 270 top
R20  5.1k  [0402-TIGHT]  35.93,11.86 270 top
R21  2.2k  [0402-TIGHT]  31.83,12.96 0 bottom
R22  2.2k  [0402-TIGHT]  31.83,17.56 0 bottom
R23  1k  [0402-TIGHT]  34.23,17.56 180 bottom
R24  20k  [0402-TIGHT]  47.23,41.56 135 bottom
R25  1M  [0402-TIGHT]  43.03,26.06 180 bottom
R26  2.2k  [0402-TIGHT]  31.53,67.26 270 bottom
R27  4.7k  [0402-TIGHT]  31.53,70.06 270 bottom
R28  1k  [0402-TIGHT]  45.13,69.16 90 bottom
R29  1k  [0402-TIGHT]  40.08,19.46 270 top
R30  10k  [0402-TIGHT]  48.18,47.86 0 bottom
R31  10k  [0402-TIGHT]  48.18,46.81 0 bottom
R32  10k  [0402-TIGHT]  44.03,69.16 270 bottom
R33  4.7k  [0402-TIGHT]  57.59,18.56 180 bottom
R34  4.7k  [0402-TIGHT]  55.11,22.05 270 bottom
R35  5.1k  [0402-TIGHT]  70.79,11.86 270 top
R36  5.1k  [0402-TIGHT]  59.29,11.86 270 top
R37  2.2k  [0402-TIGHT]  55.19,12.96 0 bottom
R38  2.2k  [0402-TIGHT]  55.19,17.56 0 bottom
R39  1k  [0402-TIGHT]  57.59,17.56 180 bottom
R40  20k  [0402-TIGHT]  70.59,41.56 135 bottom
R41  1M  [0402-TIGHT]  66.39,26.06 180 bottom
R42  2.2k  [0402-TIGHT]  54.89,67.26 270 bottom
R43  4.7k  [0402-TIGHT]  54.89,70.06 270 bottom
R44  1k  [0402-TIGHT]  68.49,69.16 90 bottom
R45  1k  [0402-TIGHT]  63.44,19.46 270 top
R46  10k  [0402-TIGHT]  71.54,47.86 0 bottom
R47  10k  [0402-TIGHT]  71.54,46.81 0 bottom
R48  10k  [0402-TIGHT]  67.39,69.16 270 bottom
RN1  10K  [2506_AR]  15.06,50.86 315 bottom
RN2  10K  [2506_AR]  44.83,50.86 45 bottom
RN3  10K  [2506_AR]  21.46,43.86 135 bottom
RN4  10K  [2506_AR]  21.46,50.86 45 bottom
RN5  10K  [2506_AR]  15.06,43.86 45 bottom
RN6  10K  [2506_AR]  38.43,50.86 315 bottom
RN7  10K  [2506_AR]  38.43,43.86 45 bottom
RN8  10K  [2506_AR]  44.83,43.86 135 bottom
RN9  10K  [2506_AR]  68.19,50.86 45 bottom
RN10  10K  [2506_AR]  61.79,50.86 315 bottom
RN11  10K  [2506_AR]  61.79,43.86 45 bottom
RN12  10K  [2506_AR]  68.19,43.86 135 bottom
RST  JUMPER-SMT_2_NC_TRACE_SILK  [SMT-JUMPER_2_NC_TRACE_SILK]  18.29,68.56 0 bottom
RST1  JUMPER-SMT_2_NC_TRACE_SILK  [SMT-JUMPER_2_NC_TRACE_SILK]  41.66,68.56 0 bottom
RST2  JUMPER-SMT_2_NC_TRACE_SILK  [SMT-JUMPER_2_NC_TRACE_SILK]  65.02,68.56 0 bottom
S1  BOOT  [TACTILE_SWITCH_SMD_4.6X2.8MM]  23.96,16.26 90 top
S2  RESET  [TACTILE_SWITCH_SMD_4.6X2.8MM]  27.66,16.26 270 top
S3  BOOT  [TACTILE_SWITCH_SMD_4.6X2.8MM]  47.33,16.26 90 top
S4  RESET  [TACTILE_SWITCH_SMD_4.6X2.8MM]  51.03,16.26 270 top
S5  BOOT  [TACTILE_SWITCH_SMD_4.6X2.8MM]  70.69,16.26 90 top
S6  RESET  [TACTILE_SWITCH_SMD_4.6X2.8MM]  74.39,16.26 270 top
SHLD  JUMPER-SMT_2_NC_TRACE_SILK  [SMT-JUMPER_2_NC_TRACE_SILK]  28.22,13.2 270 bottom
SHLD1  JUMPER-SMT_2_NC_TRACE_SILK  [SMT-JUMPER_2_NC_TRACE_SILK]  51.59,13.2 270 bottom
SHLD2  JUMPER-SMT_2_NC_TRACE_SILK  [SMT-JUMPER_2_NC_TRACE_SILK]  74.96,13.2 270 bottom
SUPPLYTIE1  2PT_GND_TIESMALL  [2PT_GND_TIE_SMALL]  12.56,47.36 270 bottom
SUPPLYTIE2  2PT_GND_TIESMALL  [2PT_GND_TIE_SMALL]  17.42,35.73 90 top
SUPPLYTIE3  2PT_GND_TIESMALL  [2PT_GND_TIE_SMALL]  18.36,35.73 90 top
SUPPLYTIE4  2PT_GND_TIESMALL  [2PT_GND_TIE_SMALL]  41.73,35.73 90 top
SUPPLYTIE5  2PT_GND_TIESMALL  [2PT_GND_TIE_SMALL]  40.79,35.73 90 top
SUPPLYTIE6  2PT_GND_TIESMALL  [2PT_GND_TIE_SMALL]  35.93,47.36 270 bottom
SUPPLYTIE7  2PT_GND_TIESMALL  [2PT_GND_TIE_SMALL]  65.1,35.73 90 top
SUPPLYTIE8  2PT_GND_TIESMALL  [2PT_GND_TIE_SMALL]  64.16,35.73 90 top
SUPPLYTIE9  2PT_GND_TIESMALL  [2PT_GND_TIE_SMALL]  59.29,47.36 270 bottom
TP1  TEST-POINT3X5  [PAD.03X.05]  11.94,74.17 0 bottom
TP2  TEST-POINT3X4  [PAD.03X.04]  10.67,52.58 90 bottom
TP3  TEST-POINT3X5  [PAD.03X.05]  27.18,66.55 0 bottom
TP4  TEST-POINT3  [PAD.03X.03]  9.4,47.5 0 bottom
TP5  TEST-POINT3X5  [PAD.03X.05]  27.18,71.63 0 bottom
TP6  TEST-POINT3X5  [PAD.03X.05]  13.21,67.82 0 bottom
TP7  TEST-POINT3X5  [PAD.03X.05]  27.18,69.09 0 bottom
TP8  TEST-POINT3X5  [PAD.03X.05]  27.18,74.17 0 bottom
TP9  TEST-POINT3  [PAD.03X.03]  25.91,48.77 0 bottom
TP10  TEST-POINT3X5  [PAD.03X.05]  35.31,74.17 0 bottom
TP11  TEST-POINT3X4  [PAD.03X.04]  34.04,52.58 90 bottom
TP12  TEST-POINT3X5  [PAD.03X.05]  50.55,66.55 0 bottom
TP13  TEST-POINT3  [PAD.03X.03]  32.77,47.5 0 bottom
TP14  TEST-POINT3X5  [PAD.03X.05]  50.55,71.63 0 bottom
TP15  TEST-POINT3X5  [PAD.03X.05]  36.58,67.82 0 bottom
TP16  TEST-POINT3X5  [PAD.03X.05]  50.55,69.09 0 bottom
TP17  TEST-POINT3X5  [PAD.03X.05]  50.55,74.17 0 bottom
TP18  TEST-POINT3  [PAD.03X.03]  49.28,48.77 0 bottom
TP19  TEST-POINT3X5  [PAD.03X.05]  58.67,74.17 0 bottom
TP20  TEST-POINT3X4  [PAD.03X.04]  57.4,52.58 90 bottom
TP21  TEST-POINT3X5  [PAD.03X.05]  73.91,66.55 0 bottom
TP22  TEST-POINT3  [PAD.03X.03]  56.13,47.5 0 bottom
TP23  TEST-POINT3X5  [PAD.03X.05]  73.91,71.63 0 bottom
TP24  TEST-POINT3X5  [PAD.03X.05]  59.94,67.82 0 bottom
TP25  TEST-POINT3X5  [PAD.03X.05]  73.91,69.09 0 bottom
TP26  TEST-POINT3X5  [PAD.03X.05]  73.91,74.17 0 bottom
TP27  TEST-POINT3  [PAD.03X.03]  72.64,48.77 0 bottom
U1  R7FA6M5  [P-LQFP100-14X14-0.50]  18.29,47.36 0 top
U2  DA14531MOD  [DA14531MOD]  18.29,72.54 0 top
U3  MCP73831  [SOT23-5]  10.36,22.27 180 bottom
U4  RT9080-33GJ5  [SOT23-5]  19.66,23.96 90 bottom
U5  W25QXX128MBIT-6X5  [WSON-8-6X5]  17.86,61.66 180 bottom
U6  RT9080-33GJ5  [SOT23-5]  11.66,56.86 0 bottom
U7  MAX17048  [DFN-8]  10.66,27.86 0 bottom
U8  LM66200  [SOT8]  13.46,23.06 270 bottom
U9  RT9080-33GJ5  [SOT23-5]  43.03,23.96 90 bottom
U10  MCP73831  [SOT23-5]  33.72,22.27 180 bottom
U11  MAX17048  [DFN-8]  34.03,27.86 0 bottom
U12  DA14531MOD  [DA14531MOD]  41.66,72.54 0 top
U13  W25QXX128MBIT-6X5  [WSON-8-6X5]  41.23,61.66 180 bottom
U14  R7FA6M5  [P-LQFP100-14X14-0.50]  41.66,47.36 0 top
U15  RT9080-33GJ5  [SOT23-5]  35.03,56.86 0 bottom
U16  LM66200  [SOT8]  36.83,23.06 270 bottom
U17  RT9080-33GJ5  [SOT23-5]  66.39,23.96 90 bottom
U18  MCP73831  [SOT23-5]  57.09,22.27 180 bottom
U19  MAX17048  [DFN-8]  57.39,27.86 0 bottom
U20  DA14531MOD  [DA14531MOD]  65.02,72.54 0 top
U21  W25QXX128MBIT-6X5  [WSON-8-6X5]  64.59,61.66 180 bottom
U22  R7FA6M5  [P-LQFP100-14X14-0.50]  65.02,47.36 0 top
U23  RT9080-33GJ5  [SOT23-5]  58.39,56.86 0 bottom
U24  LM66200  [SOT8]  60.19,23.06 270 bottom
U$1  [#I�C#0]  33.43,15.26 90 bottom
U$2  [#CHG#0]  31.73,25.46 90 bottom
U$3  [#I�C#0]  10.06,15.26 90 bottom
U$4  [#CHG#0]  8.36,25.46 90 bottom
U$5  [SFE_LOGO_FLAME_COPPER_EXPOSED_.1]  41.66,47.36 0 bottom
U$6  [#RST#0]  51.13,12.96 0 top
U$7  [#BOOT#0]  45.08,16.36 90 top
U$8  [SFE_LOGO_FLAME_COPPER_EXPOSED_.1]  18.29,47.36 0 bottom
U$9  [SWD_RA6M50]  23.66,57.11 90 bottom
U$10  [SWD_BLE0]  18.26,72.81 0 bottom
U$11  [CHG0]  42.53,24.71 90 top
U$12  [#BOOT#0]  21.71,16.36 90 top
U$13  [#RST#0]  27.76,12.96 0 top
U$14  [CHG0]  19.16,24.71 90 top
U$15  [STAT0]  9.21,67.91 0 top
U$16  [PWR0]  9.11,70.56 0 top
U$17  [RGB0]  9.01,74.16 0 top
U$18  [THING_PLUS0]  18.29,31.16 0 top
U$19  [##RST#_#0]  28.41,20.81 0 top
U$20  [#3V3_#0]  28.41,23.36 0 top
U$21  [#VREF_#0]  28.41,25.91 0 top
U$22  [#GND_#0]  28.41,28.46 0 top
U$23  [#A0_#0]  28.41,30.96 0 top
U$24  [#A1_#0]  28.41,33.51 0 top
U$25  [#A2_#0]  28.41,36.06 0 top
U$26  [A30]  27.06,38.61 90 top
U$27  [A40]  27.06,41.16 90 top
U$28  [A50]  27.06,43.66 90 top
U$29  [SCK0]  27.01,45.81 90 top
U$30  [PICO0]  27.01,48.71 90 top
U$31  [POCI0]  27.01,51.76 90 top
U$32  [RX0]  27.06,54.31 90 top
U$33  [TX0]  27.06,56.46 90 top
U$34  [FREE0]  27.06,58.96 90 top
U$35  [SDA0]  9.56,58.96 90 top
U$36  [SCL0]  9.56,56.46 90 top
U$37  [G60]  9.56,53.86 90 top
U$38  [G50]  9.56,51.31 90 top
U$39  [G40]  9.56,48.76 90 top
U$40  [G30]  9.56,46.21 90 top
U$41  [G20]  9.56,43.71 90 top
U$42  [G10]  9.56,41.21 90 top
U$43  [G00]  9.56,38.61 90 top
U$44  [VU0]  10.06,36.01 0 top
U$45  [EN0]  10.11,33.51 0 top
U$46  [VBAT0]  10.91,31.01 0 top
U$47  [#PWR#0]  12.81,70.01 0 bottom
U$48  [##RST##0]  18.36,66.81 0 bottom
U$49  [#BAT#0]  16.76,28.61 0 bottom
U$50  [#SHLD#0]  28.21,16.56 90 bottom
U$51  [#RST#0]  26.81,20.86 90 bottom
U$52  [#_3V3#0]  26.06,23.31 0 bottom
U$53  [VREF0]  25.71,25.91 0 bottom
U$54  [#_GND#0]  25.91,28.41 0 bottom
U$55  [#_A0#0]  26.41,30.96 0 bottom
U$56  [#_A1#0]  26.56,33.56 0 bottom
U$57  [#_A2#0]  26.46,36.06 0 bottom
U$58  [#_A3#0]  26.46,38.61 0 bottom
U$59  [A40]  26.96,41.11 90 bottom
U$60  [A50]  26.96,43.71 90 bottom
U$61  [SCK0]  26.96,45.81 90 bottom
U$62  [PICO0]  26.96,48.71 90 bottom
U$63  [POCI0]  26.96,51.76 90 bottom
U$64  [RX0]  26.96,54.31 90 bottom
U$65  [TX0]  26.96,56.46 90 bottom
U$66  [FREE0]  26.96,58.91 90 bottom
U$67  [SDA0]  9.56,58.96 90 bottom
U$68  [SCL0]  9.56,56.41 90 bottom
U$69  [G60]  9.61,53.91 90 bottom
U$70  [G50]  9.46,51.46 90 bottom
U$71  [G40]  9.46,48.76 90 bottom
U$72  [G30]  9.46,46.31 90 bottom
U$73  [G20]  9.46,43.71 90 bottom
U$74  [#G1#0]  9.96,41.16 0 bottom
U$75  [#G0#0]  10.06,38.61 0 bottom
U$76  [#VUSB#0]  11.11,36.06 0 bottom
U$77  [#EN_#0]  10.21,33.51 0 bottom
U$78  [#VBAT_#0]  11.26,30.96 0 bottom
U$79  [RA6M50]  18.29,29.16 0 top
U$80  [STAT0]  32.58,67.91 0 top
U$81  [PWR0]  32.48,70.56 0 top
U$82  [RA6M50]  18.29,35.36 0 bottom
U$83  [THING0]  21.26,38.11 0 bottom
U$84  [PLUS0]  15.21,38.11 0 bottom
U$85  [RGB0]  32.38,74.16 0 top
U$86  [##RST#_#0]  51.78,20.81 0 top
U$87  [#3V3_#0]  51.78,23.36 0 top
U$88  [#VREF_#0]  51.78,25.91 0 top
U$89  [#GND_#0]  51.78,28.46 0 top
U$90  [#A0_#0]  51.78,30.96 0 top
U$91  [#A1_#0]  51.78,33.51 0 top
U$92  [#A2_#0]  51.78,36.06 0 top
U$93  [A30]  50.43,38.61 90 top
U$94  [A40]  50.43,41.16 90 top
U$95  [A50]  50.43,43.66 90 top
U$96  [SCK0]  50.38,45.81 90 top
U$97  [PICO0]  50.38,48.71 90 top
U$98  [POCI0]  50.38,51.76 90 top
U$99  [RX0]  50.43,54.31 90 top
U$100  [TX0]  50.43,56.46 90 top
U$101  [FREE0]  50.43,58.96 90 top
U$102  [SDA0]  32.93,58.96 90 top
U$103  [SCL0]  32.93,56.46 90 top
U$104  [G60]  32.93,53.86 90 top
U$105  [G50]  32.93,51.31 90 top
U$106  [G40]  32.93,48.76 90 top
U$107  [G30]  32.93,46.21 90 top
U$108  [G20]  32.93,43.71 90 top
U$109  [G10]  32.93,41.21 90 top
U$110  [G00]  32.93,38.61 90 top
U$111  [VU0]  33.43,36.01 0 top
U$112  [EN0]  33.48,33.51 0 top
U$113  [VBAT0]  34.28,31.01 0 top
U$114  [#PWR#0]  36.18,70.01 0 bottom
U$115  [##RST##0]  41.73,66.81 0 bottom
U$116  [#BAT#0]  40.13,28.61 0 bottom
U$117  [#SHLD#0]  51.58,16.56 90 bottom
U$118  [#RST#0]  50.18,20.86 90 bottom
U$119  [#_3V3#0]  49.43,23.31 0 bottom
U$120  [VREF0]  49.08,25.91 0 bottom
U$121  [#_GND#0]  49.28,28.41 0 bottom
U$122  [#_A0#0]  49.78,30.96 0 bottom
U$123  [#_A1#0]  49.93,33.56 0 bottom
U$124  [#_A2#0]  49.83,36.06 0 bottom
U$125  [#_A3#0]  49.83,38.61 0 bottom
U$126  [A40]  50.33,41.11 90 bottom
U$127  [A50]  50.33,43.71 90 bottom
U$128  [SCK0]  50.33,45.81 90 bottom
U$129  [PICO0]  50.33,48.71 90 bottom
U$130  [POCI0]  50.33,51.76 90 bottom
U$131  [RX0]  50.33,54.31 90 bottom
U$132  [TX0]  50.33,56.46 90 bottom
U$133  [FREE0]  50.33,58.91 90 bottom
U$134  [SDA0]  32.93,58.96 90 bottom
U$135  [SCL0]  32.93,56.41 90 bottom
U$136  [G60]  32.98,53.91 90 bottom
U$137  [G50]  32.83,51.46 90 bottom
U$138  [G40]  32.83,48.76 90 bottom
U$139  [G30]  32.83,46.31 90 bottom
U$140  [G20]  32.83,43.71 90 bottom
U$141  [#G1#0]  33.33,41.16 0 bottom
U$142  [#G0#0]  33.43,38.61 0 bottom
U$143  [#VUSB#0]  34.48,36.06 0 bottom
U$144  [#EN_#0]  33.58,33.51 0 bottom
U$145  [#VBAT_#0]  34.63,30.96 0 bottom
U$146  [THING_PLUS0]  41.66,31.16 0 top
U$147  [RA6M50]  41.66,29.16 0 top
U$148  [SWD_RA6M50]  47.03,57.11 90 bottom
U$149  [SWD_BLE0]  41.63,72.81 0 bottom
U$150  [RA6M50]  41.66,35.36 0 bottom
U$151  [THING0]  44.63,38.11 0 bottom
U$152  [PLUS0]  38.58,38.11 0 bottom
U$153  [#I�C#0]  56.79,15.26 90 bottom
U$154  [#CHG#0]  55.09,25.46 90 bottom
U$155  [SFE_LOGO_FLAME_COPPER_EXPOSED_.1]  65.02,47.36 0 bottom
U$156  [#RST#0]  74.49,12.96 0 top
U$157  [#BOOT#0]  68.44,16.36 90 top
U$158  [CHG0]  65.89,24.71 90 top
U$159  [STAT0]  55.94,67.91 0 top
U$160  [PWR0]  55.84,70.56 0 top
U$161  [RGB0]  55.74,74.16 0 top
U$162  [##RST#_#0]  75.14,20.81 0 top
U$163  [#3V3_#0]  75.14,23.36 0 top
U$164  [#VREF_#0]  75.14,25.91 0 top
U$165  [#GND_#0]  75.14,28.46 0 top
U$166  [#A0_#0]  75.14,30.96 0 top
U$167  [#A1_#0]  75.14,33.51 0 top
U$168  [#A2_#0]  75.14,36.06 0 top
U$169  [A30]  73.79,38.61 90 top
U$170  [A40]  73.79,41.16 90 top
U$171  [A50]  73.79,43.66 90 top
U$172  [SCK0]  73.74,45.81 90 top
U$173  [PICO0]  73.74,48.71 90 top
U$174  [POCI0]  73.74,51.76 90 top
U$175  [RX0]  73.79,54.31 90 top
U$176  [TX0]  73.79,56.46 90 top
U$177  [FREE0]  73.79,58.96 90 top
U$178  [SDA0]  56.29,58.96 90 top
U$179  [SCL0]  56.29,56.46 90 top
U$180  [G60]  56.29,53.86 90 top
U$181  [G50]  56.29,51.31 90 top
U$182  [G40]  56.29,48.76 90 top
U$183  [G30]  56.29,46.21 90 top
U$184  [G20]  56.29,43.71 90 top
U$185  [G10]  56.29,41.21 90 top
U$186  [G00]  56.29,38.61 90 top
U$187  [VU0]  56.79,36.01 0 top
U$188  [EN0]  56.84,33.51 0 top
U$189  [VBAT0]  57.64,31.01 0 top
U$190  [#PWR#0]  59.54,70.01 0 bottom
U$191  [##RST##0]  65.09,66.81 0 bottom
U$192  [#BAT#0]  63.49,28.61 0 bottom
U$193  [#SHLD#0]  74.94,16.56 90 bottom
U$194  [#RST#0]  73.54,20.86 90 bottom
U$195  [#_3V3#0]  72.79,23.31 0 bottom
U$196  [VREF0]  72.44,25.91 0 bottom
U$197  [#_GND#0]  72.64,28.41 0 bottom
U$198  [#_A0#0]  73.14,30.96 0 bottom
U$199  [#_A1#0]  73.29,33.56 0 bottom
U$200  [#_A2#0]  73.19,36.06 0 bottom
U$201  [#_A3#0]  73.19,38.61 0 bottom
U$202  [A40]  73.69,41.11 90 bottom
U$203  [A50]  73.69,43.71 90 bottom
U$204  [SCK0]  73.69,45.81 90 bottom
U$205  [PICO0]  73.69,48.71 90 bottom
U$206  [POCI0]  73.69,51.76 90 bottom
U$207  [RX0]  73.69,54.31 90 bottom
U$208  [TX0]  73.69,56.46 90 bottom
U$209  [FREE0]  73.69,58.91 90 bottom
U$210  [SDA0]  56.29,58.96 90 bottom
U$211  [SCL0]  56.29,56.41 90 bottom
U$212  [G60]  56.34,53.91 90 bottom
U$213  [G50]  56.19,51.46 90 bottom
U$214  [G40]  56.19,48.76 90 bottom
U$215  [G30]  56.19,46.31 90 bottom
U$216  [G20]  56.19,43.71 90 bottom
U$217  [#G1#0]  56.69,41.16 0 bottom
U$218  [#G0#0]  56.79,38.61 0 bottom
U$219  [#VUSB#0]  57.84,36.06 0 bottom
U$220  [#EN_#0]  56.94,33.51 0 bottom
U$221  [#VBAT_#0]  57.99,30.96 0 bottom
U$222  [THING_PLUS0]  65.02,31.16 0 top
U$223  [RA6M50]  65.02,29.16 0 top
U$224  [SWD_RA6M50]  70.39,57.11 90 bottom
U$225  [SWD_BLE0]  64.99,72.81 0 bottom
U$226  [RA6M50]  65.02,35.36 0 bottom
U$227  [THING0]  67.99,38.11 0 bottom
U$228  [PLUS0]  61.94,38.11 0 bottom
Y1  24.000MHz  [4-SMD,32X25]  21.86,34.76 225 top
Y2  32.768kHz  [CRYSTAL-SMD-3.2X1.5MM]  13.66,34.76 315 top
Y3  32.768kHz  [CRYSTAL-SMD-3.2X1.5MM]  37.03,34.76 315 top
Y4  24.000MHz  [4-SMD,32X25]  45.23,34.76 225 top
Y5  32.768kHz  [CRYSTAL-SMD-3.2X1.5MM]  60.39,34.76 315 top
Y6  24.000MHz  [4-SMD,32X25]  68.59,34.76 225 top

## Library data of the parts
BAT BAT1 BAT2 CHG CHG1 CHG2 I2C I2C1 I2C2 JP1 JP2 JP4 RST RST1 RST2 SHLD SHLD1 SHLD2 = SparkFun-Jumpers
C1 C19 C27 C29 C44 C46 C56 C58 C73 C75 C85 C87 = SparkFun-Capacitors; PROD_ID: CAP-12417
C2-C6 C11 C12 C18 C22 C23 C25 C26 C28 C32 C37-C43 C51 C52 C54 C55 C57 C61 C66-C72 C80 C81 C83 C84 C86 = SparkFun-Capacitors; PROD_ID: CAP-12416
C7 C8 C35 C36 C64 C65 = SparkFun-Capacitors
C9 C10 C33 C34 C62 C63 = SparkFun-Capacitors; MOUSER_PART: 609-500R07S9R1CV4T; PROD_ID: CAP-15278
C13-C17 C30 C31 C45 C47 C48 C59 C60 C74 C76 C77 = SparkFun-Capacitors; PROD_ID: CAP-14232
C20 C21 C49 C50 C78 C79 = SparkFun-Capacitors; PROD_ID: CAP-14259
C24 C53 C82 = SparkFun-Capacitors; PROD_ID: CAP-13854
D1 D3 D11 = SparkFun-IC-Power; PROD_ID: DIO-14084
D2 D10 D15 = SparkFun-LED; PROD_ID: DIO-08575
D4 D9 D14 = SparkFun-LED; PROD_ID: DIO-15591
D5 D7 D12 = SparkFun-LED; PROD_ID: DIO-09003
D6 D8 D13 = SparkFun-LED; PROD_ID: DIO-17976
E$1-E$4 FD1-FD12 LOGO1-LOGO12 U$5 U$8 U$155 = SparkFun-Aesthetics
E$5 E$6 = SparkFun-Retired
FB1-FB6 = SparkFun-Coils; PROD_ID: NDUC-14206
FRAME1-FRAME3 = SparkFun-Aesthetics; DESIGNER: Alex Brudner; REV: v01
H1-H12 = SparkFun-Hardware
J1 J9 J16 = SparkFun_Thing_Plus_RA6M5; PROD_ID: CONN-14122
J2 J8 J15 = SparkFun-Boards
J3 J11 J18 = SparkFun-Connectors; PROD_ID: CONN-13694
J4 J13 J20 SUPPLYTIE1-SUPPLYTIE9 = SparkFun_Thing_Plus_RA6M5
J5 J14 J21 TP1-TP27 = SparkFun-Connectors
J6 J10 J17 = SparkFun-Connectors; PROD_ID: CONN-11443; SF_ID: PRT-08612
J7 J12 J19 = SparkFun-Connectors; PROD_ID: CONN-13500
Q1-Q6 = SparkFun-DiscreteSemi; PROD_ID: TRANS-14388
R1 R13 R15 R23 R28 R29 R39 R44 R45 = SparkFun-Resistors; PROD_ID: RES-14342
R2 R24 R40 = SparkFun-Resistors; PROD_ID: RES-15131
R3 R4 R19 R20 R35 R36 = SparkFun-Resistors; PROD_ID: RES-14340
R5-R7 R21 R22 R26 R37 R38 R42 = SparkFun-Resistors; PROD_ID: RES-14341
R8 R14 R16 R30-R32 R46-R48 = SparkFun-Resistors; PROD_ID: RES-14241
R9 R11 R12 R17 R18 R27 R33 R34 R43 = SparkFun-Resistors; PROD_ID: RES-15343
R10 R25 R41 = SparkFun-Resistors; PROD_ID: RES-15185
RN1-RN12 = SparkFun_Thing_Plus_RA6M5; PROD_ID: RES-14952
S1-S6 = SparkFun-Switches; PROD_ID: SWCH-15606
U1 U14 U22 = SparkFun_Thing_Plus_RA6M5; PROD_ID: IC-20781
U2 U12 U20 = SparkFun_Thing_Plus_RA6M5; PROD_ID: IC-20782
U3 U10 U18 = SparkFun-IC-Power; PROD_ID: IC-09995
U4 U6 U9 U15 U17 U23 = SparkFun-IC-Power; PROD_ID: VREG-19034
U5 U13 U21 = SparkFun-IC-Memory; PROD_ID: IC-15107
U7 U11 U19 = SparkFun-IC-Power; PROD_ID: IC-12551
U8 U16 U24 = SparkFun_Thing_Plus_RA6M5; PROD_ID: IC-20783
U$1-U$4 U$6 U$7 U$9-U$154 U$156-U$228 = output
Y1 Y4 Y6 = SparkFun_Thing_Plus_RA6M5; PN: RH100-24.000-8-1015-EXT-TR-NS1; PROD_ID: XTAL-20784
Y2 Y3 Y5 = SparkFun-Clocks; PROD_ID: XTAL-13062

## Nets
3.3V [Power]: BAT.1 C2.1 C3.1 C4.1 C5.1 C6.1 C16.1 C21.1 C22.2 C23.2 C24.1 D4.VCC D6.A FB1.1 I2C.2 J2.27 J3.2 J4.1 J5.1 Q1.2 Q2.2 R8.2 R14.2 R16.1 RN1.10 RN3.1 RN3.3 RN4.1 RN5.15 RN5.16 U1.15 U1.29 U1.46 U1.62 U1.82 U2.7 U4.5 U5.8
3.3V1 [Power]: BAT1.1 C37.1 C38.1 C39.1 C40.1 C41.1 C48.1 C50.1 C51.2 C52.2 C53.1 D8.A D9.VCC FB3.1 I2C1.2 J8.27 J11.2 J13.1 J14.1 Q3.2 Q4.2 R30.2 R31.2 R32.1 RN2.1 RN6.10 RN7.15 RN7.16 RN8.1 RN8.3 U9.5 U12.7 U13.8 U14.15 U14.29 U14.46 U14.62 U14.82
3.3V2 [Power]: BAT2.1 C66.1 C67.1 C68.1 C69.1 C70.1 C77.1 C79.1 C80.2 C81.2 C82.1 D13.A D14.VCC FB5.1 I2C2.2 J15.27 J18.2 J20.1 J21.1 Q5.2 Q6.2 R46.2 R47.2 R48.1 RN9.1 RN10.10 RN11.15 RN11.16 RN12.1 RN12.3 U17.5 U20.7 U21.8 U22.15 U22.29 U22.46 U22.62 U22.82
3.3V_SW [Power]: C28.2 J7.4 Q1.3
3.3V_SW1 [Power]: C57.2 J12.4 Q4.3
3.3V_SW2 [Power]: C86.2 J19.4 Q6.3
!CTS_RA6/RTS_DA14531! [LS Digital]: TP7.1 U1.47 U2.13
!CTS_RA6/RTS_DA14531!1 [LS Digital]: TP16.1 U12.13 U14.47
!CTS_RA6/RTS_DA14531!2 [LS Digital]: TP25.1 U20.13 U22.47
!DA14531_RST!: J5.6 R13.1 R16.2 RST.1
!DA14531_RST!1: J14.6 R28.1 R32.2 RST1.1
!DA14531_RST!2: J21.6 R44.1 R48.2 RST2.1
!FG_ALRT!: RN5.1 U1.100 U7.5
!FG_ALRT!1: RN7.1 U11.5 U14.100
!FG_ALRT!2: RN11.1 U19.5 U22.100
!NMI!: RN4.16 TP9.1 U1.40
!NMI!1: RN2.16 TP18.1 U14.40
!NMI!2: RN9.16 TP27.1 U22.40
!QCS!: RN1.7 U1.77 U5.1
!QCS!1: RN6.7 U13.1 U14.77
!QCS!2: RN10.7 U21.1 U22.77
!RA6M5_RESET!: J2.28 J4.6 R14.1 S2.3 S2.4 U1.38 U2.8
!RA6M5_RESET!1: J8.28 J13.6 R31.1 S4.3 S4.4 U12.8 U14.38
!RA6M5_RESET!2: J15.28 J20.6 R47.1 S6.3 S6.4 U20.8 U22.38
!RTS_RA6/CTS_DA14531! [LS Digital]: TP8.1 U1.49 U2.16
!RTS_RA6/CTS_DA14531!1 [LS Digital]: TP17.1 U12.16 U14.49
!RTS_RA6/CTS_DA14531!2 [LS Digital]: TP26.1 U20.16 U22.49
!SD_EN!: R15.1 RN3.16 U1.16
!SD_EN!1: R29.1 RN8.16 U14.16
!SD_EN!2: R45.1 RN12.16 U22.16
A0 [Analog]: J2.24 U1.85
A1 [Analog]: J2.23 U1.84
A2 [Analog]: J2.22 U1.81
A3 [Analog]: J2.21 U1.80
A4 [Analog]: J2.20 U1.79
A5 [Analog]: J2.19 U1.78
A6 [Analog]: J8.24 U14.85
A7 [Analog]: J8.23 U14.84
A8 [Analog]: J8.22 U14.81
A9 [Analog]: J8.21 U14.80
A10 [Analog]: J8.20 U14.79
A11 [Analog]: J8.19 U14.78
A12 [Analog]: J15.24 U22.85
A13 [Analog]: J15.23 U22.84
A14 [Analog]: J15.22 U22.81
A15 [Analog]: J15.21 U22.80
A16 [Analog]: J15.20 U22.79
A17 [Analog]: J15.19 U22.78
AGND [Analog Ground]: C25.2 C26.2 C27.2 C29.2 SUPPLYTIE1.P$1 U1.86 U1.89 U1.90
AGND1 [Analog Ground]: C54.2 C55.2 C56.2 C58.2 SUPPLYTIE6.P$1 U14.86 U14.89 U14.90
AGND2 [Analog Ground]: C83.2 C84.2 C85.2 C87.2 SUPPLYTIE9.P$1 U22.86 U22.89 U22.90
AVCC0 [Power]: C25.1 C29.1 FB1.2 TP4.1 U1.88
AVCC1 [Power]: C54.1 C58.1 FB3.2 TP13.1 U14.88
AVCC2 [Power]: C83.1 C87.1 FB5.2 TP22.1 U22.88
BAT_SW: RN5.2 U1.99 U8.8
BAT_SW1: RN7.2 U14.99 U16.8
BAT_SW2: RN11.2 U22.99 U24.8
BOOT/MD: R8.1 S1.3 S1.4 U1.39 U2.15
BOOT/MD1: R30.1 S3.3 S3.4 U12.15 U14.39
BOOT/MD2: R46.1 S5.3 S5.4 U20.15 U22.39
DA14531_RST: Q2.3 TP3.1 U2.12
DA14531_RST1: Q3.3 TP12.1 U12.12
DA14531_RST2: Q5.3 TP21.1 U20.12
DA14531_SWCLK [HS Digital]: J5.3 U2.10
DA14531_SWCLK1 [HS Digital]: J14.3 U12.10
DA14531_SWCLK2 [HS Digital]: J21.3 U20.10
DA14531_SWDIO [HS Digital]: J5.2 U2.9
DA14531_SWDIO1 [HS Digital]: J14.2 U12.9
DA14531_SWDIO2 [HS Digital]: J21.2 U20.9
EXTAL [CLK signals]: C7.2 U1.14 Y1.1
EXTAL1 [CLK signals]: C35.2 U14.14 Y4.1
EXTAL2 [CLK signals]: C64.2 U22.14 Y6.1
FREE: J2.13 U1.44
FREE1: J8.13 U14.44
FREE2: J15.13 U22.44
GND [Power]: C1.1 C2.2 C3.2 C4.2 C5.2 C6.2 C11.2 C12.2 C13.2 C14.2 C15.2 C16.2 C17.2 C18.1 C19.2 C20.2 C21.2 C22.1 C23.1 C24.2 C28.1 D1.2 D4.GND J1.GND J1.GND2 J2.25 J3.1 J4.5 J5.5 J6.1 J7.6 J7.GND1 J7.GND2 J7.GND3 J7.GND4 J7.GND5 J7.GND6 JP4.1 R2.1 R3.1 R4.1 R5.1 R11.1 RN1.1 RN1.2 RN1.3 RN1.4 RN1.5 RN1.8 RN3.2 RN3.4 RN3.5 RN3.6 RN3.8 RN4.2 RN4.3 RN4.4 RN4.5 RN4.6 RN4.7 RN4.8 RN4.9 RN5.9 RN5.10 RN5.11 RN5.12 RN5.13 RN5.14 S1.1 S1.2 S2.1 S2.2 SHLD.1 SUPPLYTIE1.P$2 SUPPLYTIE2.P$2 SUPPLYTIE3.P$1 U1.12 U1.26 U1.45 U1.63 U1.83 U2.1 U2.2 U2.3 U2.4 U2.6 U2.11 U3.2 U4.2 U5.4 U6.2 U7.1 U7.4 U7.6 U7.9 U8.1 U8.4 U8.5
GND1 [Power]: C30.2 C31.2 C32.1 C37.2 C38.2 C39.2 C40.2 C41.2 C42.2 C43.2 C44.2 C45.2 C46.1 C47.2 C48.2 C49.2 C50.2 C51.1 C52.1 C53.2 C57.1 D3.2 D9.GND J8.25 J9.GND J9.GND2 J10.1 J11.1 J12.6 J12.GND1 J12.GND2 J12.GND3 J12.GND4 J12.GND5 J12.GND6 J13.5 J14.5 JP1.1 R18.1 R19.1 R20.1 R24.1 R26.1 RN2.2 RN2.3 RN2.4 RN2.5 RN2.6 RN2.7 RN2.8 RN2.9 RN6.1 RN6.2 RN6.3 RN6.4 RN6.5 RN6.8 RN7.9 RN7.10 RN7.11 RN7.12 RN7.13 RN7.14 RN8.2 RN8.4 RN8.5 RN8.6 RN8.8 S3.1 S3.2 S4.1 S4.2 SHLD1.1 SUPPLYTIE4.P$1 SUPPLYTIE5.P$2 SUPPLYTIE6.P$2 U9.2 U10.2 U11.1 U11.4 U11.6 U11.9 U12.1 U12.2 U12.3 U12.4 U12.6 U12.11 U13.4 U14.12 U14.26 U14.45 U14.63 U14.83 U15.2 U16.1 U16.4 U16.5
GND2 [Power]: C59.2 C60.2 C61.1 C66.2 C67.2 C68.2 C69.2 C70.2 C71.2 C72.2 C73.2 C74.2 C75.1 C76.2 C77.2 C78.2 C79.2 C80.1 C81.1 C82.2 C86.1 D11.2 D14.GND J15.25 J16.GND J16.GND2 J17.1 J18.1 J19.6 J19.GND1 J19.GND2 J19.GND3 J19.GND4 J19.GND5 J19.GND6 J20.5 J21.5 JP2.1 R34.1 R35.1 R36.1 R40.1 R42.1 RN9.2 RN9.3 RN9.4 RN9.5 RN9.6 RN9.7 RN9.8 RN9.9 RN10.1 RN10.2 RN10.3 RN10.4 RN10.5 RN10.8 RN11.9 RN11.10 RN11.11 RN11.12 RN11.13 RN11.14 RN12.2 RN12.4 RN12.5 RN12.6 RN12.8 S5.1 S5.2 S6.1 S6.2 SHLD2.1 SUPPLYTIE7.P$1 SUPPLYTIE8.P$2 SUPPLYTIE9.P$2 U17.2 U18.2 U19.1 U19.4 U19.6 U19.9 U20.1 U20.2 U20.3 U20.4 U20.6 U20.11 U21.4 U22.12 U22.26 U22.45 U22.63 U22.83 U23.2 U24.1 U24.4 U24.5
GND_7 [CLK grounds]: C33.1 C34.1 SUPPLYTIE5.P$1
GND_8 [CLK grounds]: C35.1 C36.1 SUPPLYTIE4.P$2
GND_15 [CLK grounds]: C62.1 C63.1 SUPPLYTIE8.P$1
GND_16 [CLK grounds]: C64.1 C65.1 SUPPLYTIE7.P$2
GND_24 [CLK grounds]: C7.1 C8.1 SUPPLYTIE3.P$2
GND_32 [CLK grounds]: C9.1 C10.1 SUPPLYTIE2.P$1
GPIO0/!CS!: J2.9 U1.55
GPIO0/!CS!1: J8.9 U14.55
GPIO0/!CS!2: J15.9 U22.55
GPIO1: J2.8 U1.7
GPIO2: J2.7 U1.6
GPIO3: J2.6 U1.5
GPIO4: J2.5 U1.4
GPIO5: J2.4 U1.3
GPIO6: J2.3 U1.30
GPIO7: J8.8 U14.7
GPIO8: J8.7 U14.6
GPIO9: J8.6 U14.5
GPIO10: J8.5 U14.4
GPIO11: J8.4 U14.3
GPIO12: J8.3 U14.30
GPIO13: J15.8 U22.7
GPIO14: J15.7 U22.6
GPIO15: J15.6 U22.5
GPIO16: J15.5 U22.4
GPIO17: J15.4 U22.3
GPIO18: J15.3 U22.30
N$1: CHG.2 R9.1
N$2: CHG.1 D5.A
N$3: D5.C U3.1
N$4: Q2.1 R13.2
N$5: R11.2 U3.5
N$6: D2.C R5.2
N$7: RN1.9 U1.92
N$8: RN3.9 U1.36
N$9: C1.2 R1.1 RN3.7
N$10: I2C.1 R6.2
N$11: I2C.3 R7.2
N$12: RN3.15 U1.17
N$13: RN3.14 U1.18
N$14: JP4.2 R12.1
N$15: R2.2 RN3.10 U1.25
N$16: D6.C R12.2
N$17: RN1.14 U1.61
N$18: RN1.15 U1.60
N$19: J1.SHLD1 J1.SHLD2 J1.SHLD3 J1.SHLD4 J1.SHLD5 J1.SHLD6 J1.SHLD7 J1.SHLD8 SHLD.2
N$20: J1.B5 R3.2
N$21: J1.A5 R4.2
N$22: RN1.16 U1.59
N$23: RN4.15 U1.43
N$24: RN1.13 U1.67
N$25: RST.2 U1.58
N$26: RN3.13 U1.19
N$27: RN3.12 U1.20
N$28: RN3.11 U1.21
N$29 [Power]: C26.1 C27.1 FB2.1 U1.87 U1.91
N$30: RN4.13 U1.41
N$31: RN4.12 U1.48
N$32: RN4.14 U1.42
N$33 [Power]: BAT.2 U1.8
N$34: CHG1.2 R17.1
N$35: RN4.10 U1.57
N$36: RN4.11 U1.56
N$37: RN1.12 U1.68
N$38: CHG1.1 D7.A
N$39: D7.C U10.1
N$40: R18.2 U10.5
N$41: RN5.8 U1.93
N$42: RN5.7 U1.94
N$43: RN5.6 U1.95
N$44: RN5.5 U1.96
N$45: RN5.4 U1.97
N$46: RN5.3 U1.98
N$47: Q1.1 R15.2
N$48: I2C1.1 R22.2
N$49: I2C1.3 R21.2
N$50: J9.SHLD1 J9.SHLD2 J9.SHLD3 J9.SHLD4 J9.SHLD5 J9.SHLD6 J9.SHLD7 J9.SHLD8 SHLD1.2
N$51: J9.B5 R19.2
N$52: J9.A5 R20.2
N$53: C42.1 U14.9
N$54: C43.1 U14.64
N$55: C46.2 R23.1 RN8.7
N$56: R24.2 RN8.10 U14.25
N$57: D10.C R26.2
N$58: JP1.2 R27.1
N$59: D8.C R27.2
N$60: RN6.13 U14.67
N$61: RN8.13 U14.19
N$62: RN8.12 U14.20
N$63: RN8.11 U14.21
N$64: RN2.10 U14.57
N$65: RN2.11 U14.56
N$66: RN6.12 U14.68
N$67: RN7.7 U14.94
N$68: RN7.6 U14.95
N$69: RN7.5 U14.96
N$70: RN7.4 U14.97
N$71: RN7.3 U14.98
N$72: RN2.12 U14.48
N$73: RN2.14 U14.42
N$74: RN7.8 U14.93
N$75: Q3.1 R28.2
N$76: Q4.1 R29.2
N$77: RST1.2 U14.58
N$78 [Power]: C55.1 C56.1 FB4.1 U14.87 U14.91
N$79 [Power]: BAT1.2 U14.8
N$80: RN8.9 U14.36
N$81: RN8.15 U14.17
N$82: RN8.14 U14.18
N$83: RN6.9 U14.92
N$84: RN6.14 U14.61
N$85: RN6.15 U14.60
N$86: RN6.16 U14.59
N$87: RN2.15 U14.43
N$88: RN2.13 U14.41
N$89: CHG2.2 R33.1
N$90: CHG2.1 D12.A
N$91: D12.C U18.1
N$92: R34.2 U18.5
N$93: I2C2.1 R38.2
N$94: I2C2.3 R37.2
N$95: J16.SHLD1 J16.SHLD2 J16.SHLD3 J16.SHLD4 J16.SHLD5 J16.SHLD6 J16.SHLD7 J16.SHLD8 SHLD2.2
N$96: J16.B5 R35.2
N$97: C11.1 U1.9
N$98: C12.1 U1.64
N$99: J16.A5 R36.2
N$100: C71.1 U22.9
N$101: C72.1 U22.64
N$102: C75.2 R39.1 RN12.7
N$103: R40.2 RN12.10 U22.25
N$104: D15.C R42.2
N$105: JP2.2 R43.1
N$106: D13.C R43.2
N$107: RN10.13 U22.67
N$108: RN12.13 U22.19
N$109: RN12.12 U22.20
N$110: RN12.11 U22.21
N$111: RN9.10 U22.57
N$112: RN9.11 U22.56
N$113: RN10.12 U22.68
N$114: RN11.7 U22.94
N$115: RN11.6 U22.95
N$116: RN11.5 U22.96
N$117: RN11.4 U22.97
N$118: RN11.3 U22.98
N$119: RN9.12 U22.48
N$120: RN9.14 U22.42
N$121: RN11.8 U22.93
N$122: Q5.1 R44.2
N$123: Q6.1 R45.2
N$124: RST2.2 U22.58
N$125 [Power]: C84.1 C85.1 FB6.1 U22.87 U22.91
N$126 [Power]: BAT2.2 U22.8
N$127: RN12.9 U22.36
N$128: RN12.15 U22.17
N$129: RN12.14 U22.18
N$130: RN10.9 U22.92
N$131: RN10.14 U22.61
N$132: RN10.15 U22.60
N$133: RN10.16 U22.59
N$134: RN9.15 U22.43
N$135: RN9.13 U22.41
QIO0 [HS Digital]: U1.73 U5.5
QIO1 [HS Digital]: U1.74 U5.2
QIO2 [HS Digital]: U1.71 U5.3
QIO3 [HS Digital]: U1.72 U5.7
QIO4 [HS Digital]: U13.2 U14.74
QIO5 [HS Digital]: U13.5 U14.73
QIO6 [HS Digital]: U13.7 U14.72
QIO7 [HS Digital]: U13.3 U14.71
QIO8 [HS Digital]: U21.2 U22.74
QIO9 [HS Digital]: U21.5 U22.73
QIO10 [HS Digital]: U21.7 U22.72
QIO11 [HS Digital]: U21.3 U22.71
QSPCLK [HS Digital]: U1.75 U5.6
QSPCLK1 [HS Digital]: U13.6 U14.75
QSPCLK2 [HS Digital]: U21.6 U22.75
RA6_SWCLK/TCK [HS Digital]: J4.3 U1.50
RA6_SWCLK/TCK1 [HS Digital]: J13.3 U14.50
RA6_SWCLK/TCK2 [HS Digital]: J20.3 U22.50
RA6_SWDIO/TMS [HS Digital]: J4.2 U1.51
RA6_SWDIO/TMS1 [HS Digital]: J13.2 U14.51
RA6_SWDIO/TMS2 [HS Digital]: J20.2 U22.51
RA6_SWO/TDO/PICO [HS Digital]: J2.17 J4.4 U1.52
RA6_SWO/TDO/PICO1 [HS Digital]: J8.17 J13.4 U14.52
RA6_SWO/TDO/PICO2 [HS Digital]: J15.17 J20.4 U22.52
RA6_TDI/POCI [HS Digital]: J2.16 U1.53
RA6_TDI/POCI1 [HS Digital]: J8.16 U14.53
RA6_TDI/POCI2 [HS Digital]: J15.16 U22.53
RGB_DIN [LS Digital]: D4.DI U1.70
RGB_DIN1 [LS Digital]: D9.DI U14.70
RGB_DIN2 [LS Digital]: D14.DI U22.70
RGB_DOUT [LS Digital]: D4.DO TP1.1
RGB_DOUT1 [LS Digital]: D9.DO TP10.1
RGB_DOUT2 [LS Digital]: D14.DO TP19.1
RX_RA6/TX_DA1 [LS Digital]: TP15.1 U12.5 U14.66
RX_RA6/TX_DA2 [LS Digital]: TP24.1 U20.5 U22.66
RX_RA6/TX_DA14531 [LS Digital]: TP6.1 U1.66 U2.5
SCK [HS Digital]: J2.18 U1.54
SCK1 [HS Digital]: J8.18 U14.54
SCK2 [HS Digital]: J15.18 U22.54
SCL [LS Digital]: J2.2 J3.4 R7.1 U1.1 U7.7
SCL1 [LS Digital]: J8.2 J11.4 R21.1 U11.7 U14.1
SCL2 [LS Digital]: J15.2 J18.4 R37.1 U19.7 U22.1
SDA [LS Digital]: J2.1 J3.3 R6.1 U1.2 U7.8
SDA1 [LS Digital]: J8.1 J11.3 R22.1 U11.8 U14.2
SDA2 [LS Digital]: J15.1 J18.3 R38.1 U19.8 U22.2
SDCLK [HS Digital]: J7.5 U1.33
SDCLK1 [HS Digital]: J12.5 U14.33
SDCLK2 [HS Digital]: J19.5 U22.33
SDCMD [LS Digital]: J7.3 U1.34
SDCMD1 [LS Digital]: J12.3 U14.34
SDCMD2 [LS Digital]: J19.3 U22.34
SDDAT0 [HS Digital]: J7.7 U1.37
SDDAT1 [HS Digital]: J7.8 U1.22
SDDAT2 [HS Digital]: J7.1 U1.31
SDDAT3 [HS Digital]: J7.2 U1.32
SDDAT4 [HS Digital]: J12.2 U14.32
SDDAT5 [HS Digital]: J12.1 U14.31
SDDAT6 [HS Digital]: J12.8 U14.22
SDDAT7 [HS Digital]: J12.7 U14.37
SDDAT8 [HS Digital]: J19.2 U22.32
SDDAT9 [HS Digital]: J19.1 U22.31
SDDAT10 [HS Digital]: J19.8 U22.22
SDDAT11 [HS Digital]: J19.7 U22.37
SDDET: J7.9 U1.35
SDDET1: J12.9 U14.35
SDDET2: J19.9 U22.35
STAT_LED: D2.A U1.69
STAT_LED1: D10.A U14.69
STAT_LED2: D15.A U22.69
TX_RA6/RX_DA1 [LS Digital]: TP14.1 U12.14 U14.65
TX_RA6/RX_DA2 [LS Digital]: TP23.1 U20.14 U22.65
TX_RA6/RX_DA14531 [LS Digital]: TP5.1 U1.65 U2.14
UART_RX [LS Digital]: J2.15 U1.24
UART_RX1 [LS Digital]: J8.15 U14.24
UART_RX2 [LS Digital]: J15.15 U22.24
UART_TX [LS Digital]: J2.14 U1.23
UART_TX1 [LS Digital]: J8.14 U14.23
UART_TX2 [LS Digital]: J15.14 U22.23
USBD_N [USB diff]: D1.4 U1.27
USBD_N1 [USB diff]: D3.4 U14.27
USBD_N2 [USB diff]: D11.4 U22.27
USBD_P [USB diff]: D1.6 U1.28
USBD_P1 [USB diff]: D3.6 U14.28
USBD_P2 [USB diff]: D11.6 U22.28
USBIN_N [USB diff]: D1.3 J1.A7 J1.B7
USBIN_N1 [USB diff]: D3.3 J9.A7 J9.B7
USBIN_N2 [USB diff]: D11.3 J16.A7 J16.B7
USBIN_P [USB diff]: D1.1 J1.A6 J1.B6
USBIN_P1 [USB diff]: D3.1 J9.A6 J9.B6
USBIN_P2 [USB diff]: D11.1 J16.A6 J16.B6
V_BATT [Power]: C15.1 C18.2 J2.12 J6.2 U3.3 U7.2 U7.3 U8.3
V_BATT1 [Power]: C31.1 C32.2 J8.12 J10.2 U10.3 U11.2 U11.3 U16.3
V_BATT2 [Power]: C60.1 C61.2 J15.12 J17.2 U18.3 U19.2 U19.3 U24.3
V_USB [Power]: C13.1 D1.5 J1.VBUS1 J1.VBUS2 J2.10 R1.2 R9.2 U3.4 U8.6
V_USB1 [Power]: C30.1 D3.5 J8.10 J9.VBUS1 J9.VBUS2 R17.2 R23.2 U10.4 U16.6
V_USB2 [Power]: C59.1 D11.5 J15.10 J16.VBUS1 J16.VBUS2 R33.2 R39.2 U18.4 U24.6
VIN [Power]: C14.1 C17.1 C20.1 R10.2 RN1.11 U4.1 U6.1 U8.2 U8.7
VIN1 [Power]: C45.1 C47.1 C49.1 R25.2 RN6.11 U9.1 U15.1 U16.2 U16.7
VIN2 [Power]: C74.1 C76.1 C78.1 R41.2 RN10.11 U17.1 U23.1 U24.2 U24.7
VREF1 [Power]: C19.1 FB2.2 J2.26 U6.5
VREF2 [Power]: C44.1 FB4.2 J8.26 U15.5
VREF3 [Power]: C73.1 FB6.2 J15.26 U23.5
VREFEN: RN1.6 TP2.1 U1.76 U6.3
VREFEN1: RN6.6 TP11.1 U14.76 U15.3
VREFEN2: RN10.6 TP20.1 U22.76 U23.3
VREG_EN: J2.11 R10.1 U4.3
VREG_EN1: J8.11 R25.1 U9.3
VREG_EN2: J15.11 R41.1 U17.3
XCIN [CLK signals]: C10.2 U1.10 Y2.P$1
XCIN1 [CLK signals]: C33.2 U14.10 Y3.P$1
XCIN2 [CLK signals]: C62.2 U22.10 Y5.P$1
XCOUT [CLK signals]: C9.2 U1.11 Y2.P$2
XCOUT1 [CLK signals]: C34.2 U14.11 Y3.P$2
XCOUT2 [CLK signals]: C63.2 U22.11 Y5.P$2
XTAL [CLK signals]: C8.2 U1.13 Y1.3
XTAL1 [CLK signals]: C36.2 U14.13 Y4.3
XTAL2 [CLK signals]: C65.2 U22.13 Y6.3

## Tracks (layer width: path | path; a pad name or v marks a point on that pad's centre or on a via)
3.3V  (via drill 0.3)  (86 unrouted)